# Allegro board megaHeatv2_GND_Final.brd
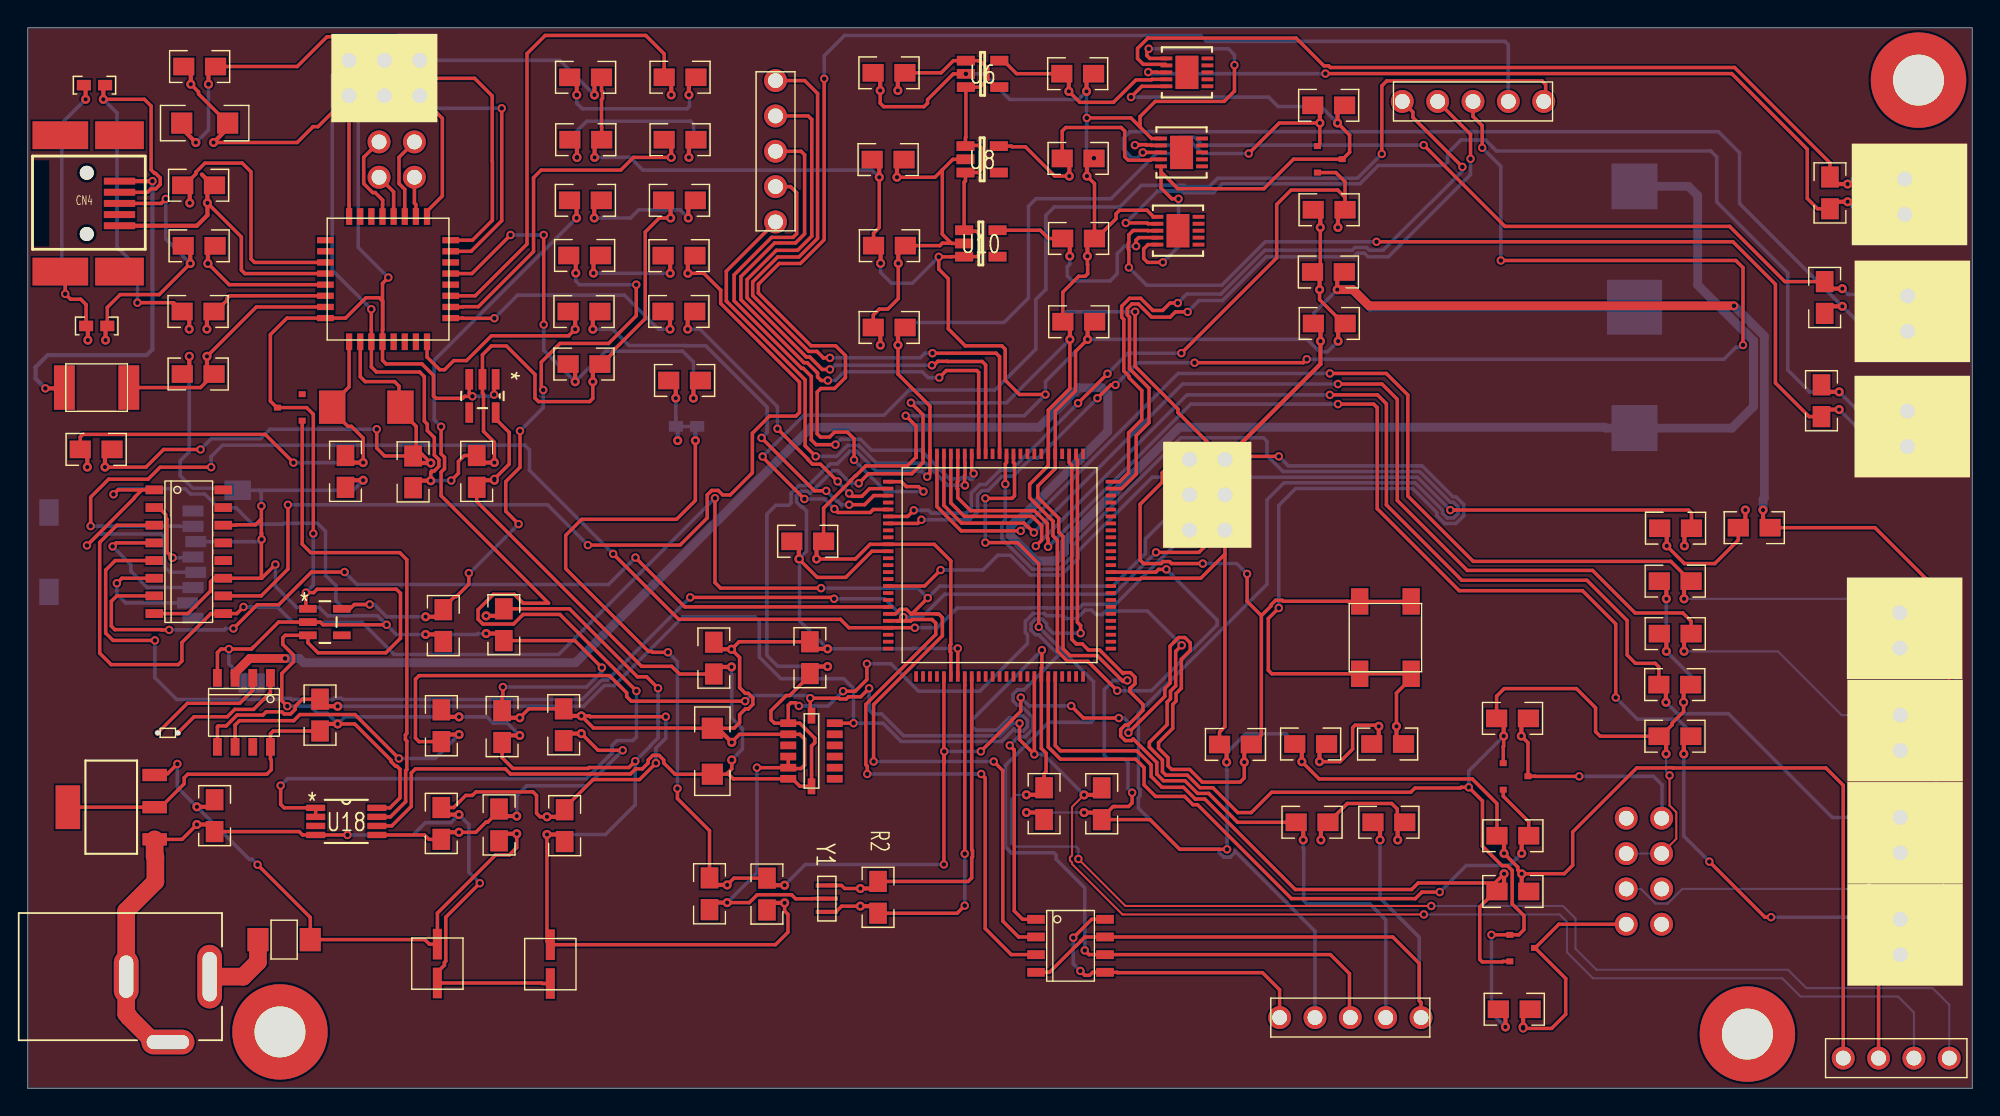
[diagram p0: board, top side]
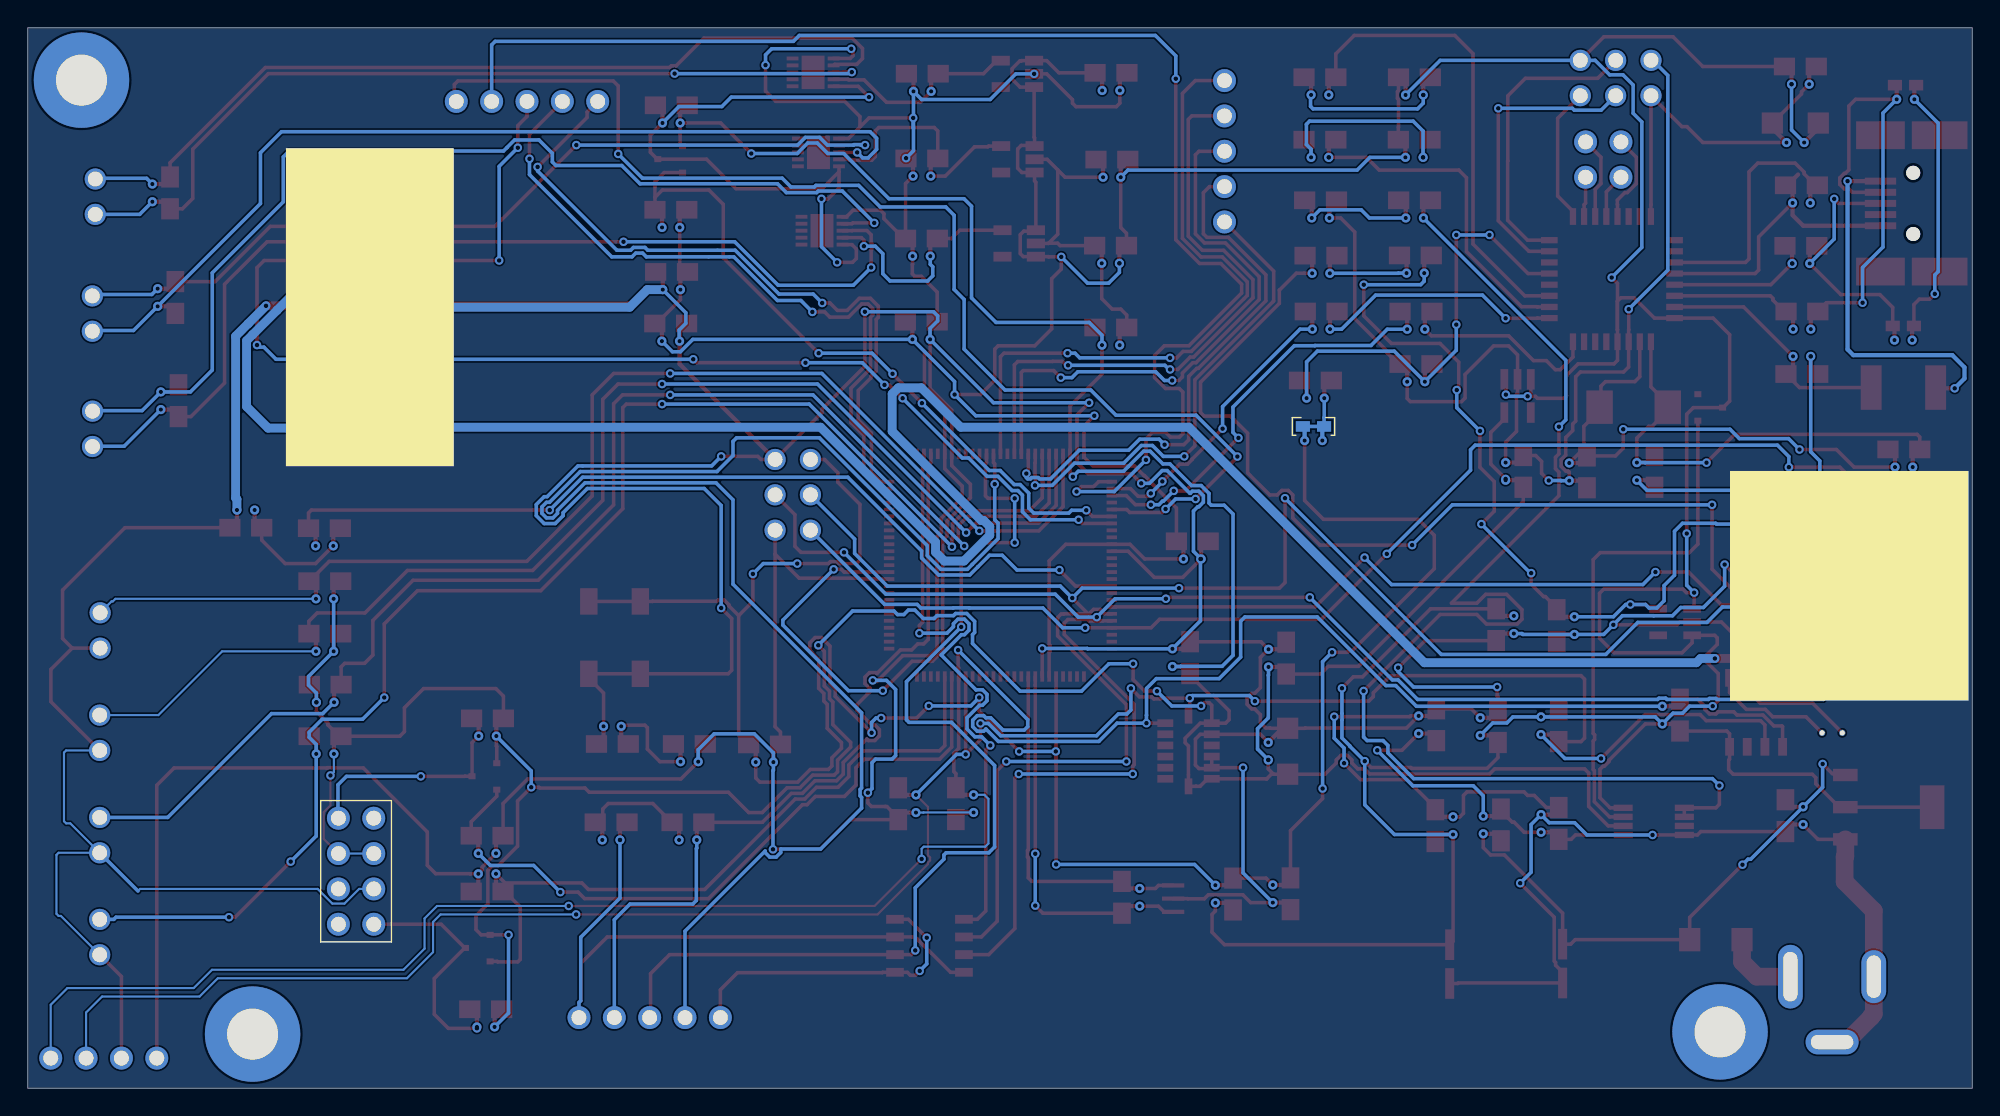
[diagram p1: board, bottom side, seen from below]

Outline 139.7 x 76.2 mm; copper layers: TOP, BOTTOM. Coordinates in mm from the lower left corner of the outline.
Outline path: 0,76.2 139.7,76.2 139.7,0 0,0 0,76.2

## Placement (name value [footprint] x y rotation side)
BT1  CR1220Holder  [CR1220]  115.44 56.12 270 bottom
C1  22P  [0805RF_WV_12D]  48.98 13.97 90 top
C2  100n  [0805RF_WV_12D]  61.89 54.67 0 top
C3  100n  [0805RF_WV_12D]  38.57 18.87 270 top
C4  100n  [0805RF_WV_12D]  75.51 55.08 0 top
C5  100n  [0805RF_WV_12D]  56.03 39.3 0 top
C6  0.1u  [0805RF_WV_12D]  34.07 25.98 90 top
C7  10u/10V  [0805RF_WV_12D]  29.85 33.24 270 top
C8  0.1u  [0805RF_WV_12D]  34.2 33.31 270 top
C9  0.1uF  [0805RF_WV_12D]  129.48 64.34 90 top
C10  0.1uF  [0805RF_WV_12D]  129.1 56.82 90 top
C11  10uF  [0805RF_WV_12D]  61.87 72.97 0 top
C12  10uF  [0805RF_WV_12D]  61.81 66.73 0 top
C13  10uF  [0805RF_WV_12D]  61.91 60.55 0 top
C14  10uF  [0805RF_WV_12D]  75.43 72.9 0 top
C15  10uF  [0805RF_WV_12D]  75.46 66.81 0 top
C16  10uF  [0805RF_WV_12D]  75.5 61.06 0 top
C22  10u  [1206RF_WV_12D]  49.18 24.21 90 top
C23  0.1u  [0805RF_WV_12D]  49.29 30.91 90 top
C24  0.1u  [0805RF_WV_12D]  56.19 30.94 90 top
C25  47u  [RADCAP]  29.43 8.95 90 top
C26  100n  [0805RF_WV_12D]  13.42 19.58 270 top
C27  47u  [RADCAP]  37.54 8.92 90 top
C28  1u  [0805RF_WV_12D]  32.25 44.32 90 top
C29  100n  [0805RF_WV_12D]  29.71 19.02 90 top
C30  100n  [0805RF_WV_12D]  12.24 51.32 180 top
C31  1u  [0805RF_WV_12D]  12.27 64.88 0 top
C32  22P  [0805RF_WV_12D]  22.82 44.32 90 top
C33  22P  [0805RF_WV_12D]  27.68 44.29 90 top
C34  100n  [0805RF_WV_12D]  47.19 50.86 0 top
C35  100n  [0805RF_WV_12D]  93.51 54.95 0 top
C36  100n  [0805RF_WV_12D]  93.45 58.65 0 top
C37  0.1uF  [0805RF_WV_12D]  128.87 49.4 90 top
CN1  uSD  [USD]  1.52 29.11 90 bottom
CN3  DC21MMX_POWERSUPPLY  [DC_JACK]  13.06 8.01 180 top
CN4  USB_B MINI  [USBBMINI]  0.34 63.58 0 top
D1  RED  [0805RF_WV_12D]  46.79 59.83 0 top
D4  CD1206-S01575  [0805RF_WV_12D]  53.11 13.95 90 top
D5  M7  [DO21]  18.41 10.67 180 top
D6  GREEN ON  [0805RF_WV_12D]  97.7 24.73 180 top
D7  YELLOW  [0805RF_WV_12D]  46.82 63.8 0 top
D8  RED  [0805RF_WV_12D]  46.86 68.16 0 top
D9  GREEN  [0805RF_WV_12D]  46.86 72.65 0 top
D10  CD1206-S01575  [1206RF_WV_12D]  12.71 69.35 0 top
D13  RED  [0805RF_WV_12D]  124.04 40.28 180 top
D14  LED  [0805RF_WV_12D]  97.79 19.11 0 top
F2  MF-MSMF050-2 500mA  [FUSE]  4.94 50.35 0 top
J1  ICSP  [ISCP]  83.47 40.1 0 top
J2  CON2  [2X1CONN]  134.85 64.07 0 top
J3  CON2  [2X1CONN]  135.06 55.66 0 top
J4  CON2  [2X1CONN]  135.05 47.38 0 top
J7  HEADER 2x2/SM  [2X2CON]  27.77 65.46 90 top
J8  Reset-EN  [0603RF_WV_12D]  47.33 47.56 180 bottom
J9  HEADER 3x2/SM  [ISCP]  28.16 71.32 90 top
J10  COMM Header  [4X1CONN]  134.25 2.16 90 top
J12  HEADER 5  [5X1CONN]  95.02 5.07 90 top
J13  Extra Digital Pin  [5X1CONN]  103.84 70.91 270 top
J14  Extra Analog Pins  [5X1CONN]  53.72 67.33 0 top
NOREF  -  [unnamed]  18.12 4.04 0 top
NOREF#2  -  [unnamed]  135.85 72.44 0 top
NOREF#3  -  [unnamed]  123.55 3.89 0 top
Q1  MOSFET N  [SOT23]  93.55 66.76 0 top
Q2  MOSFET N  [SOT23]  107.37 10.08 0 top
Q3  MOSFET N  [SOT23]  106.9 22.42 0 top
Q4  FDN340P  [SOT23]  18.82 48.91 180 top
R1  10K  [0805RF_WV_12D]  86.77 24.7 0 top
R2  1M  [0805RF_WV_12D]  61.09 13.72 270 top
R3  10K  [0805RF_WV_12D]  73.02 20.45 270 top
R4  10K  [0805RF_WV_12D]  77.16 20.44 270 top
R5  2.2k  [0805RF_WV_12D]  20.99 26.81 90 top
R6  2.2k  [0805RF_WV_12D]  29.71 26.05 90 top
R7  1k  [0805RF_WV_12D]  40 59.84 0 top
R8  10K  [0805RF_WV_12D]  118.36 36.44 0 top
R9  10K  [0805RF_WV_12D]  118.36 32.66 0 top
R10  10K  [0805RF_WV_12D]  118.33 29 0 top
R11  10K  [0805RF_WV_12D]  118.34 25.29 0 top
R12  10K  [0805RF_WV_12D]  93.47 70.63 0 top
R13  10K  [0805RF_WV_12D]  93.5 63.13 0 top
R20  10K  [0805RF_WV_12D]  106.8 5.67 0 top
R21  10K  [0805RF_WV_12D]  106.7 14.14 180 top
R22  10K  [0805RF_WV_12D]  106.67 26.57 0 top
R23  10K  [0805RF_WV_12D]  106.7 18.14 0 top
R24  1k  [0805RF_WV_12D]  92.17 24.73 0 top
R25  1k  [0805RF_WV_12D]  40.06 63.8 0 top
R26  10K  [0805RF_WV_12D]  33.86 18.92 90 top
R27  10K  [0805RF_WV_12D]  38.5 26.12 90 top
R28  22R  [0805RF_WV_12D]  12.31 60.53 0 top
R29  22R  [0805RF_WV_12D]  12.23 55.82 0 top
R30  1M  [0805RF_WV_12D]  4.91 45.9 0 top
R31  1k  [0805RF_WV_12D]  39.96 55.81 0 top
R32  1k  [0805RF_WV_12D]  46.77 55.82 0 top
R33  1k  [0805RF_WV_12D]  40.09 68.16 0 top
R34  1k  [0805RF_WV_12D]  40.07 72.64 0 top
R35  1k  [0805RF_WV_12D]  39.96 52.04 0 top
R36  10K  [0805RF_WV_12D]  12.34 73.42 0 top
R39  768  [0805RF_WV_12D]  118.39 40.24 0 top
R40  750  [0805RF_WV_12D]  92.27 19.11 0 top
RT1  EC95F  [2X1CONN]  134.51 32.89 0 top
RT2  EC95F  [2X1CONN]  134.54 25.54 0 top
RT3  EC95F  [2X1CONN]  134.54 18.19 0 top
RT4  EC95F  [2X1CONN]  134.54 10.86 0 top
RV1  CG0603MLC-05E  [0603RF_WV_12D]  4.95 54.78 0 top
RV2  CG0603MLC-05E  [0603RF_WV_12D]  4.79 72.08 0 top
SW1  SW PUSHBUTTON-SPST-2/SM  [SMDPB]  97.54 32.38 90 top
U1  ATmega2560-TQFP  [MEGA2560]  69.82 37.59 0 top
U2  DS1307  [SOIC8]  15.53 27.01 270 top
U3  CD74HC4050  [SOIC16]  11.56 38.55 0 top
U4  LP2983  [MF05A]  21.34 33.5 0 top
U5  MAX31850  [TDFN10]  83.28 73 0 top
U6  MIC5225-3.3YM5  [DBV0005A_M]  68.6 72.89 0 top
U7  MAX31850  [TDFN10]  82.89 67.25 0 top
U8  MIC5225-3.3YM5  [DBV0005A_M]  68.57 66.75 0 top
U9  MAX31850  [TDFN10]  82.64 61.62 0 top
U10  MIC5225-3.3YM5  [DBV0005A_M]  68.47 60.71 0 top
U14  ESP8266  [ESP8266_MODULE]  116.12 15.59 180 bottom
U15  -  [ADXL345]  56.31 24.23 0 top
U16  NCP1117ST50T3G  [DCY4]  5.99 20.19 90 top
U17  LP2985  [DBV5]  32.66 49.75 270 top
U18  LMV358IDGKR  [MUA]  22.88 19.17 0 top
U19  ATmega16U2-TQFP  [ATMEGA16U2]  25.88 58.14 90 top
U20  MCP4131  [SOIC8]  74.92 10.23 0 top
Y1  CSTCE16M0V53-R0 16MHZ  [CSTCE16M0V53]  57.41 13.62 270 top
Y2  32.768  [ECS3X8]  10.06 25.53 0 top
Y4  16MHz  [ECX64A]  24.32 48.94 180 top

## Library data of the parts
BT1 = CR1220Holder
C1-C5 C9-C16 C23 C24 C26 C28-C37 = CAPACITOR NON-POL
C6-C8 C22 C25 C27 = C
CN1 = uSD
CN3 = CONN PLUG 3: User Part Number: X; Tolerance: X
CN4 = USB_B MINI
D1 D6-D9 D13 D14 = LED
D4 D5 D10 = DIODE
F2 = FUSE
J1 J9 = HEADER 3x2/SM
J2-J4 = CON2
J7 = HEADER 2x2/SM
J8 = JUMPER
J10 = HEADER 4
J12-J14 = HEADER 5
Q1-Q3 = MOSFET N
Q4 = MOSFET P
R1-R13 R20-R36 R39 R40 = R
RT1-RT4 = THERMISTOR
RV1 RV2 = VARISTOR
SW1 = SW PUSHBUTTON-SPST-2/SM
U1 = ATmega2560-TQFP_1
U2 = DS1307
U3 = CD74HC4050M_0
U4 = LP2983 SOT-23
U5 U7 U9 = MAX31850_0
U6 U8 U10 = MIC5225-3.3YM5
U14 = ESP8266_0
U15 = ADXL345
U16 = NCP1117ST50_0
U17 = LP2985_0
U18 = LMV358
U19 = ATmega16U2-TQFP_1
U20 = MCP4131
Y1 = OSC6/SM
Y2 = CRYSTAL
Y4 = XM/SM

## Footprints (pads in the part's own frame, mm; a bottom-side part is the same pattern mirrored in y, then rotated)
2X1CONN
  round 1.524 hole 1.067: 1(0,1.27) 2(0,-1.27)
2X2CON
  round 1.651 hole 1.067: 1(0,0) 2(0,2.54) 3(2.54,0) 4(2.54,2.54)
4X1CONN
  round 1.651 hole 1.067: 1(0,3.81) 2(0,1.27) 3(0,-1.27) 4(0,-3.81)
5X1CONN
  round 1.651 hole 1.067: 1(0,5.08) 2(0,2.54) 3(0,0) 4(0,-2.54) 5(0,-5.08)
0603RF_WV_12D
  rect 1.016x0.762 smd: 1(-0.762,0) 2(0.762,0)
0805RF_WV_12D
  rect 1.524x1.27 smd: 1(-1.143,0) 2(1.143,0)
1206RF_WV_12D
  rect 1.524x1.524 smd: 1(-1.651,0) 2(1.651,0)
ADXL345
  rect 1.145x0.55 smd: 1(-1.67,2) 2(-1.67,1.2) 3(-1.67,0.4) 4(-1.67,-0.4) 5(-1.67,-1.2) 6(-1.67,-2) 8(1.67,-2) 9(1.67,-1.2) 10(1.67,-0.4) 11(1.67,0.4) 12(1.67,1.2) 13(1.67,2)
  rect 1.145x0.55 smd rot 89.7: 7(0,-2.54) 14(0,2.54)
ATMEGA16U2
  rect 1.2x0.45 smd: 1(-4.5,2.8) 2(-4.5,2) 3(-4.5,1.2) 4(-4.5,0.4) 5(-4.5,-0.4) 6(-4.5,-1.2) 7(-4.5,-2) 8(-4.5,-2.8) 17(4.5,-2.8) 18(4.5,-2) 19(4.5,-1.2) 20(4.5,-0.4) 21(4.5,0.4) 22(4.5,1.2) 23(4.5,2) 24(4.5,2.8)
  rect 0.45x1.2 smd: 9(-2.8,-4.5) 10(-2,-4.5) 11(-1.2,-4.5) 12(-0.4,-4.5) 13(0.4,-4.5) 14(1.2,-4.5) 15(2,-4.5) 16(2.8,-4.5) 25(2.8,4.5) 26(2,4.5) 27(1.2,4.5) 28(0.4,4.5) 29(-0.4,4.5) 30(-1.2,4.5) 31(-2,4.5) 32(-2.8,4.5)
CR1220
  rect 3.302x3.302 smd: 1(-8.687,0) 3(8.687,0)
  rect 3.962x3.962 smd: 2(0,0)
CSTCE16M0V53
  rect 0.3x1.6 smd: 1(-0.95,0) 2(0,0) 3(0.95,0)
DBV5
  rect 1.473x0.559 smd: 1(-1.194,0.95) 2(-1.194,0) 3(-1.194,-0.95) 4(1.194,-0.95) 5(1.194,0.95)
DBV0005A_M
  rect 1.3x0.7 smd: 1(-1.2,0.95) 2(-1.2,0) 3(-1.2,-0.95) 4(1.2,-0.95) 5(1.2,0.95)
DC_JACK
  oval 1.778x4.572 hole 1.016x3.556: 1(0,0)
  oval 1.778x3.81 hole 1.016x3.048: 2(5.994,0)
  oval 3.81x1.778 hole 3.048x1.016: 3(2.997,4.699)
DCY4
  rect 0.889x1.765 smd: 1(-2.311,-3.118) 2(0,-3.118) 3(2.311,-3.118)
  rect 3.15x1.765 smd: 4(0,3.118)
DO21
  rect 1.524x1.676 smd: 1(-1.88,0) 2(1.88,0)
ECS3X8
  round 0.45 hole 0.35: 1(-0.725,0) 2(0.725,0)
ECX64A
  rect 1.9x2.4 smd: 1(-2.45,0) 2(2.45,0)
ESP8266_MODULE
  round 1.651 hole 1.067: 1(-1.27,3.81) 2(-1.27,1.27) 3(-1.27,-1.27) 4(-1.27,-3.81) 5(1.27,3.81) 6(1.27,1.27) 7(1.27,-1.27) 8(1.27,-3.81)
FUSE
  rect 1.5x3.2 smd: 1(-2.315,0) 2(2.315,0)
ISCP
  round 1.524 hole 1.067: 1(0,0) 2(2.54,0) 3(0,2.54) 4(2.54,2.54) 5(0,5.08) 6(2.54,5.08)
MEGA2560
  rect 0.75x0.27 smd: 1(-8,6) 2(-8,5.5) 3(-8,5) 4(-8,4.5) 5(-8,4) 6(-8,3.5) 7(-8,3) 8(-8,2.5) 9(-8,2) 10(-8,1.5) 11(-8,1) 12(-8,0.5) 13(-8,0) 14(-8,-0.5) 15(-8,-1) 16(-8,-1.5) 17(-8,-2) 18(-8,-2.5) 19(-8,-3) 20(-8,-3.5) 21(-8,-4) 22(-8,-4.5) 23(-8,-5) 24(-8,-5.5) 25(-8,-6) 51(8,-6) 52(8,-5.5) 53(8,-5) 54(8,-4.5) 55(8,-4) 56(8,-3.5) 57(8,-3) 58(8,-2.5) 59(8,-2) 60(8,-1.5) 61(8,-1) 62(8,-0.5) 63(8,0) 64(8,0.5) 65(8,1) 66(8,1.5) 67(8,2) 68(8,2.5) 69(8,3) 70(8,3.5) 71(8,4) 72(8,4.5) 73(8,5) 74(8,5.5) 75(8,6)
  rect 0.27x0.75 smd: 26(-6,-8) 27(-5.5,-8) 28(-5,-8) 29(-4.5,-8) 30(-4,-8) 31(-3.5,-8) 32(-3,-8) 33(-2.5,-8) 34(-2,-8) 35(-1.5,-8) 36(-1,-8) 37(-0.5,-8) 38(0,-8) 39(0.5,-8) 40(1,-8) 41(1.5,-8) 42(2,-8) 43(2.5,-8) 44(3,-8) 45(3.5,-8) 46(4,-8) 47(4.5,-8) 48(5,-8) 49(5.5,-8) 50(6,-8) 76(6,8) 77(5.5,8) 78(5,8) 79(4.5,8) 80(4,8) 81(3.5,8) 82(3,8) 83(2.5,8) 84(2,8) 85(1.5,8) 86(1,8) 87(0.5,8) 88(0,8) 89(-0.5,8) 90(-1,8) 91(-1.5,8) 92(-2,8) 93(-2.5,8) 94(-3,8) 95(-3.5,8) 96(-4,8) 97(-4.5,8) 98(-5,8) 99(-5.5,8) 100(-6,8)
MF05A
  rect 1.27x0.559 smd: 1(-1.219,0.953) 2(-1.219,0) 3(-1.219,-0.953) 4(1.219,-0.953) 5(1.219,0.953)
MUA
  rect 1.372x0.457 smd: 1(-2.197,0.975) 2(-2.197,0.325) 3(-2.197,-0.325) 4(-2.197,-0.975) 5(2.197,-0.975) 6(2.197,-0.325) 7(2.197,0.325) 8(2.197,0.975)
RADCAP
  rect 2.2x0.65 smd: 1(1.395,0) 2(-1.395,0)
SMDPB
  rect 1.9x1.25 smd: 1(-2.6,1.85) 2(-2.6,-1.85) 3(2.6,-1.85) 4(2.6,1.85)
SOIC8
  rect 1.27x0.635 smd: 1(-2.477,1.905) 2(-2.477,0.635) 3(-2.477,-0.635) 4(-2.477,-1.905) 5(2.477,-1.905) 6(2.477,-0.635) 7(2.477,0.635) 8(2.477,1.905)
SOIC16
  rect 1.27x0.635 smd: 1(-2.477,4.445) 2(-2.477,3.175) 3(-2.477,1.905) 4(-2.477,0.635) 5(-2.477,-0.635) 6(-2.477,-1.905) 7(-2.477,-3.175) 8(-2.477,-4.445) 9(2.477,-4.445) 10(2.477,-3.175) 11(2.477,-1.905) 12(2.477,-0.635) 13(2.477,0.635) 14(2.477,1.905) 15(2.477,3.175) 16(2.477,4.445)
SOT23
  rect 0.508x0.432 smd: 1(-0.889,0.94) 2(-0.889,-0.965) 3(0.889,0)
TDFN10
  rect 1.65x2.4 smd: (0,0)
  rect 0.85x0.28 smd: 1(-1.475,1) 2(-1.475,0.5) 3(-1.475,0) 4(-1.475,-0.5) 5(-1.475,-1) 6(1.475,-1) 7(1.475,-0.5) 8(1.475,0) 9(1.475,0.5) 10(1.475,1)
unnamed
  round 6.858 hole 3.658: (0,0)
USBBMINI
  rect 2.25x0.5 smd: 1(6.251,1.6) 2(6.251,0.8) 3(6.251,0) 4(6.248,-1.605) 5(6.248,-0.803)
  round 1.001 hole 1.001: 6(3.899,2.2) 7(3.899,-2.2)
  rect 4x1.999 smd: 8(1.999,4.9) 10(1.999,-4.9)
  rect 3.5x1.999 smd: 9(6.251,4.9) 11(6.251,-4.9)
USD
  rect 0.8x1.5 smd: 1(4.66,10.34) 2(5.76,9.94) 3(6.86,10.34) 4(7.96,10.54) 5(9.06,10.343) 6(10.16,10.54) 7(11.26,10.34) 8(12.36,10.34)
  rect 1.9x1.4 smd: 9(12.25,0) 10(6.55,0)
  rect 1.4x1.9 smd: 11(0,14.55) 12(13.85,13.55)

## Nets
3V3: C2.2 C22.1 C23.1 C24.1 C28.1 Q1.1(GATE) Q2.1(GATE) Q3.1(GATE) R8.1 R9.1 R10.2 R11.1 R12.1 R20.1 R22.1 U1.98(AREF) U14.2(VCC) U14.6(CHPD) U15.1(VDD) U15.6(VSS) U15.7(CS) U17.5(OUT) U18.6(2IN-)
3V3_A1: C14.1 U5.4(VDD) U6.5(OUT)
3V3_A2: C15.1 U7.4(VDD) U8.5(OUT)
3V3_A3: C16.1 U9.4(VDD) U10.5(OUT)
5V: C3.2 C4.2 C5.2 C6.1 C8.1 C11.2 C12.1 C13.1 C27.1 C35.2 C36.1 D4.1(K) D10.1(K) J1.2 J9.2 J10.1 Q4.3(SOURCE) R1.1 R3.2 R4.2 R5.1 R6.2 R13.1 R21.1 R23.1 R24.1 R33.2 R34.2 R36.2 U1.10(VCC) U1.31(VCC0) U1.61(VCC1) U1.80(VCC2) U1.100(AVCC) U2.8(VCC) U4.1(VIN) U4.3(ON/OFF) U6.1(IN) U6.3(EN) U8.1(IN) U8.3(EN) U10.1(IN) U10.3(EN) U16.2(OUT) U16.4(TAB) U17.1(IN) U17.3(ON/OFF) U18.8(VCC) U19.4(VCC) U19.32(AVCC)
GND: BT1.2(NEG) C1.1 C2.1 C3.1 C4.1 C5.1 C6.2 C7.2 C8.2 C11.1 C12.2 C13.2 C14.2 C15.2 C16.2 C22.2 C23.2 C24.2 C25.2 C26.2 C27.2 C28.2 C29.2 C30.2 C32.1 C33.1 C35.1 C36.2 CN1.6(VSS) CN1.11(MT1) CN1.12(MT2) CN3.2 CN3.3 D6.1(CATHODE) D7.1(CATHODE) D13.1(CATHODE) J1.6 J9.6 J10.2 R27.2 R35.2 RT1.2 RT2.2 RT3.2 RT4.2 SW1.1 SW1.2 U1.11(GND) U1.32(GND0) U1.62(GND1) U1.81(GND2) U1.99(AGND) U2.4(GND) U3.8(GND) U3.11(5A) U3.14(6A) U4.2(GND) U5.1(GND) U6.2(GND) U7.1(GND) U8.2(GND) U9.1(GND) U10.2(GND) U14.7(GND) U15.2(GND) U15.4(GND1) U15.5(GND2) U16.1(GND) U17.2(GND) U18.4(GND) U19.3(GND) Y1.2
VDD: C7.1 CN1.4(VDD) R7.1 U3.1(VCC) U4.5(VOUT)
VIN: C25.1 C26.1 D5.1(K) R26.1 U16.3(IN)
A0: R8.2 RT1.1 U1.97(PF0)
A1: R9.2 RT2.1 U1.96(PF1)
A2: R10.1 RT3.1 U1.95(PF2)
A3: R11.2 RT4.1 U1.94(PF3)
A4: J14.5 U1.93(PF4)
A5: J14.4 U1.92(PF5)
A6: J14.3 U1.91(PF6)
A7: J14.2 U1.90(PF7)
A9: J14.1 U1.88(PK1)
A10: J12.2 U1.87(PK2)
A11: J12.3 U1.86(PK3) U20.6(P0W)
ADC8: U1.89(PK0)
ADC12: U1.85(PK4)
ADC13: U1.84(PK5)
ADC14: U1.83(PK6)
ADC15: U1.82(PK7)
CD: CN1.9(CD1)
CMP: C29.1 R26.2 R27.1 U18.5(2IN+)
COMP_5V: J12.1 U20.5(P0A) U20.8(VDD)
COMP_GND: D14.1(CATHODE) J12.5 U20.4(VSS) U20.7(P0B)
CS: CN1.2(CS) U3.6(3Y)
D2: Q1.2(DRAIN) R13.2 U1.6(PE4)
D3: J13.3 U1.7(PE5)
D4: J13.2 U1.1(PG5)
D5: J13.1 U1.5(PE3)
D8: R39.2 U1.16(PH4)
D22: J12.4 R40.1 U1.78(PA0)
D23: U1.77(PA1) U20.1(CS)
D24: U1.76(PA2)
D25: J13.5 U1.75(PA3)
D26: J13.4 U1.74(PA4)
D27: U1.73(PA5)
D28: U1.72(PA6)
D29: U1.71(PA7)
D50: CN1.7(DATA_OUT) J1.1 U1.22(PB3)
D51: J1.4 U1.21(PB2) U3.5(2A) U20.3(SDI)
D52: J1.3 U1.20(PB1) U3.3(1A) U3.9(4A) U20.2(SCK)
D53: U1.19(PB0) U3.7(3A)
D+: CN4.3(D+) R28.1 RV1.2
D-: CN4.2(D-) R29.1 RV2.2
DATA: Q1.3(SOURCE) R12.2 U5.5(DQ) U7.5(DQ) U9.5(DQ)
DATA_IN: CN1.3(DATA_IN) U3.4(2Y)
DTR: C34.2 R35.1 U19.13(PD7)
GATE_CMD: Q4.1(GATE) U18.7(2OUT)
M8RXD: R32.1 U19.9(PD3)
M8TXD: R31.1 U19.8(PD2)
MISO2: J9.1 U19.17(PB3)
MOSI2: J9.4 U19.16(PB2)
PB4: U1.23(PB4)
PB5: U1.24(PB5)
PB6: U1.25(PB6)
PB7: U1.26(PB7)
PB7_118442: U18.3(1IN+)
PC0: U1.53(PC0)
PC1: U1.54(PC1)
PC2: U1.55(PC2)
PC3: U1.56(PC3)
PC4: U1.57(PC4)
PC5: U1.58(PC5)
PC6: U1.59(PC6)
PC7: U1.60(PC7)
PD7: U1.50(PD7)
PG0: U1.51(PG0)
PG1: U1.52(PG1)
PG2: U1.70(PG2)
PH3: U1.15(PH3)
PH5: U1.17(PH5)
PH6: U1.18(PH6)
PL0: U1.35(PL0)
PL1: U1.36(PL1)
PL2: U1.37(PL2)
PL3: U1.38(PL3)
PL4: U1.39(PL4)
PL5: U1.40(PL5)
PL6: U1.41(PL6)
PL7: U1.42(PL7)
RD+: R28.2 U19.29(D+)
RD-: R29.2 U19.30(D-)
RESET: C1.2 C34.1 D4.2(A) J1.5 J8.1 J8.2 R1.2 SW1.3 SW1.4 U1.30(RESET)
RESET2: D10.2(A) J9.5 R36.1 U19.24(RESET)
RX: Q3.3(SOURCE) R22.2 U14.1(URXD)
RX0: R32.2 U1.2(PE0)
RX1: Q3.2(DRAIN) R23.2 U1.45(PD2)
RXD2: U1.12(PH0)
RXD3: U1.63(PJ0)
RXL: D8.1(CATHODE) U19.10(PD4)
SCK: CN1.5(SCLK) U3.2(1Y)
SCK2: J9.3 U19.15(PB1)
SCL: J10.3 R4.1 R6.1 U1.43(PD0) U2.6(SCL) U15.14(SCL)
SDA: J10.4 R3.1 R5.2 U1.44(PD1) U2.5(SDA) U15.13(SDA)
T1+: C9.1 J2.2 U5.3(T+)
T1-: C9.2 J2.1 U5.2(T-)
T2+: C10.1 J3.2 U7.3(T+)
T2-: C10.2 J3.1 U7.2(T-)
T3+: C37.1 J4.2 U9.3(T+)
T3-: C37.2 J4.1 U9.2(T-)
TX: Q2.3(SOURCE) R20.2 U14.8(UTXD)
TX0: R31.2 U1.3(PE1)
TX1: Q2.2(DRAIN) R21.2 U1.46(PD3)
TXD2: U1.13(PH1)
TXD3: U1.64(PJ1)
TXL: D9.1(CATHODE) U19.11(PD5)
UGND: C31.2 CN4.4(GND) U19.28(UGND)
USBVCC: Q4.2(DRAIN)
USBVCC_67256: C30.1 F2.2 U19.31(UVCC)
XTAL1: R2.1 U1.34(XTAL1) Y1.1
XTAL2: R2.2 U1.33(XTAL2) Y1.3
N49913: U5.6(AD0)
N49921: U5.7(AD1)
N49929: U5.8(AD2)
N49937: U5.9(AD3)
N50039: U7.6(AD0)
N50047: U7.7(AD1)
N50055: U7.8(AD2)
N50063: U7.9(AD3)
N50153: U9.6(AD0)
N50161: U9.7(AD1)
N50169: U9.8(AD2)
N50177: U9.9(AD3)
N67463: C32.2 R30.1 U19.1(XTAL1) Y4.2
N67475: C33.2 R30.2 U19.2((PC0)XTAL2) Y4.1
N69961: J7.1(3) U19.18(PB4)
N69973: J7.2(4) U19.20(PB6)
N69986: J7.3(1) U19.19(PB5)
N69998: J7.4(2) U19.21(PB7)
N74387: CN4.10(MT3) RV1.1 RV2.1
N75068: C31.1 U19.27(UCAP)
N94564: U2.1(X1) Y2.2
N94576: U2.2(X2) Y2.1
N95840: D1.2(ANODE) U3.10(4Y)
N95896: D1.1(CATHODE) R7.2
N117689: CN3.1 D5.2(A)
N118450: R25.1 U18.1(1OUT) U18.2(1IN-)
N147126: BT1.1(PW1) BT1.3(PW2) U2.3(VBAT)
N705510: D9.2(ANODE) R34.1
N709150: D8.2(ANODE) R33.1
N742370: CN4.1(VCC) F2.1
N1183820: D6.2(ANODE) R24.2
N1184920: D7.2(ANODE) R25.2
N1866050: D13.2(ANODE) R39.1
N1974051: D14.2(ANODE) R40.2

Pads without a net: CN1 1 8 10; CN4 5 6 7 8 9 11; U1 4 8 9 14 27 28 29 47 48 49 65 66 67 68 69 79; U2 7; U3 12 13 15 16; U4 4; U5 10; U6 4; U7 10; U8 4; U9 10; U10 4; U14 3 4 5; U15 3 8 9 10 11 12; U17 4; U19 5 6 7 12 14 22 23 25 26

## Via types
v1: diameter 0.61, hole 0.33, TOP to BOTTOM, 224 vias
v2: diameter 0.66, hole 0.305, TOP to BOTTOM, 148 vias

## Routing (per net, layer and track width the routed paths; a pad name or vN(x,y) marks a point on that pad's centre or on a via; arc(x,y) is an arc through that point)
3V3: length 323.7
  TOP w0.152: v1(117.96,22.47) 117.96,20.32 118.44,19.84 118.44,17.91 U14.2
  TOP w0.254: U18.6 26.15,18.85 27.55,20.25 27.55,22.65 27.84,22.94 34.31,22.94 34.68,22.57 40.43,22.57 40.44,22.58 43.3,22.58 43.66,22.94 44.14,22.94 44.57,23.37 44.57,23.59 44.9,23.91 45.36,23.91 45.69,23.59 45.69,23.37 46.5,22.56 C22.1 50.2,22.56 ; C23.1 46.82,29.76 46.27,30.31 44.1,30.31 32.25,42.16 C28.1 ; Q1.1 92.83,67.88 v2(92.83,69.36) 89.92,69.36 v1(87.72,67.17) ; v2(106.04,25.3) 106.04,24.58 106.01,24.55 Q3.1 ; v1(33.52,43.78) 34.59,44.85 34.59,47.12 33.61,48.09 U17.5 ; R22.1 105.53,28.17 106.07,28.71 111.26,28.71 112.64,27.34 112.64,25.62 112.97,25.29 R11.1 117.33,25.29 118.14,26.11 118.14,26.23 118.97,27.06 v1(118.97,27.73) ; U15.1 55.46,26.23 56.55,25.15 56.55,24.83 56.31,24.59 56.31,22.52 U15.7 55.78,21.69 55.77,21.69 55.47,21.69 54.93,22.23 U15.6 50.69,22.23 ; U15.1 53.64,26.23 53.39,26.49 53.39,27.12 54.49,28.22 54.74,28.22 56.19,29.67 C24.1 ; U15.1 54.64,27.51 54.82,27.69 55.17,27.69 v1(55.4,27.47) ; 50.69,22.23 50.36,22.56 50.2,22.56 ; 50.69,22.23 50.7,22.22 ; v1(60.29,30.5) 60.29,29.37 59.45,28.53 v1(58.57,28.53) ; v1(64.62,43.94) 64.82,44.14 U1.98 64.82,49.02 62.52,51.31 v2(62.52,53.4) ; 50.65,23.6 v1(50.57,23.6) 50.58,23.59 v2(50.58,23.58) 50.58,22.94 50.2,22.56 ; v1(105.16,11.02) Q2.1 107.12,11.02 107.5,11.39 107.5,12.4 106.65,13.25 106.65,15.65 106.31,15.99 105.92,15.99 104.51,17.39 104.51,20.64 v1(103.53,21.62) 102.97,21.62 102.92,21.57 99.67,21.57 99.36,21.27 89.36,21.27 87.9,19.81 86.93,19.81 85.15,21.59 84.22,21.59 83.31,22.5 81.76,22.5 81.52,22.74 81.52,23.57 80.58,24.51 80.58,24.85 81.86,26.13 81.86,27.75 82.1,27.99 82.1,28.53 82.47,28.91 82.47,31.39 v1(82.91,31.83)
  TOP w0.305: R22.1 106.04,26.07 v2(106.04,25.3) ; R10.2 118.97,28.49 v1(118.97,27.73) ; v2(92.83,69.36) 92.83,70.12 R12.1 ; v2(117.73,35.17) 117.73,35.93 R8.1 ; v2(117.71,24.02) 117.71,24.78 R11.1 ; C2.2 62.52,54.16 v2(62.52,53.4) ; C24.1 56.7,30.3 v2(57.46,30.3) ; v2(33.52,43.69) 32.76,43.69 C28.1 ; v2(117.73,31.39) 117.73,32.16 R9.1 ; v2(50.56,30.27) 49.8,30.27 C23.1 ; v2(106.17,4.4) 106.17,5.16 R20.1
  BOTTOM w0.152: U14.6 U14.2 ; v1(117.96,22.47) 117.71,22.72 v2(117.71,24.02)
  BOTTOM w0.254: v1(50.57,23.6) 51.35,24.37 51.35,25.83 50.57,26.61 50.57,29.67 50.56,29.69 v2(50.56,30.27) ; v1(60.29,30.5) 62.03,30.5 64,28.53 68.4,28.53 71.82,31.95 71.82,32.59 71.67,32.75 71.67,33.55 72.24,34.11 73.04,34.11 73.19,33.96 74.38,33.96 74.59,33.75 75.36,33.75 75.97,34.36 76.43,34.36 76.76,34.03 77.21,34.03 77.47,34.29 80.44,34.29 v1(82.91,31.83) ; v1(118.97,27.73) 118.97,28.4 119.53,28.96 119.53,29.59 v2(117.73,31.39) v2(117.73,35.17) ; v1(87.72,67.17) 84.42,67.17 83.67,67.92 82.97,67.92 82.22,67.17 81.07,67.17 77.83,63.92 72.43,63.92 71.89,63.38 71.89,56.79 70.14,55.03 63.44,55.03 62.52,54.11 v2(62.52,53.4) ; v1(64.62,43.94) 64.22,44.34 60.97,44.34 60.63,44.67 59.53,45.78 59.06,45.78 58.15,44.86 57.64,44.86 56.09,43.31 55.4,43.31 54.83,42.74 54.83,42.05 54.67,41.89 53.74,41.89 53.11,41.26 53.11,31.1 53.89,30.31 56.86,30.31 56.88,30.3 v2(57.46,30.3) ; v1(103.53,21.62) 103.53,22.8 v2(106.04,25.3) ; v1(55.4,27.47) 57.51,27.47 v1(58.57,28.53) ; v2(33.52,43.69) v1(33.52,43.78) ; v2(106.17,4.4) 105.16,5.4 v1(105.16,11.02)
3V3_A1: length 14.4
  TOP w0.254: U6.5 70.1,73.84 71.04,72.9 C14.1 ; U5.4 80.77,72.5 80.73,72.46 79.62,72.46 78,70.85 75.58,70.85 v2(74.8,71.63)
  TOP w0.305: C14.1 74.8,72.4 v2(74.8,71.63)
3V3_A2: length 18.7
  TOP w0.254: v2(74.83,65.54) 73.78,65.54 71.68,67.65 70.73,67.65 70.67,67.7 U8.5 ; U7.4 80.74,66.75 80.68,66.69 79.06,66.69 78.81,66.94 78.81,68.78 78.56,69.04 74.57,69.04 74.32,68.78 C15.1
  TOP w0.305: C15.1 74.83,66.31 v2(74.83,65.54)
3V3_A3: length 16.9
  TOP w0.254: C16.1 73.34,61.06 72.74,61.66 U10.5 ; U9.4 79.81,61.12 79.63,60.94 v1(79.63,60.51)
  TOP w0.305: v2(74.86,59.79) 74.86,60.55 C16.1
  BOTTOM w0.254: v1(79.63,60.51) 78.81,60.51 78.27,59.97 78.27,58.53 77.75,58.01 75.05,58.01 74.68,58.38 74.68,59.03 74.86,59.21 v2(74.86,59.79)
5V: length 605.1
  TOP w0.254: R23.1 105.56,20.45 103.79,22.22 92.78,22.22 v2(91.54,23.46) ; v1(63.07,48.32) 63.82,47.58 U1.100 63.82,45.35 63.19,44.72 60.2,44.72 59.51,44.02 59.47,44.02 59.14,43.7 59.14,43.66 57.18,41.69 C5.2 ; J10.1 130.44,21.77 129.19,23.01 118.21,23.01 118.19,23.03 117.73,23.03 117.71,23.01 115.6,23.01 111,18.42 111,16.01 110.39,15.41 107.92,15.41 107.92,15.41 v2(107.33,15.41) 107.05,15.68 107.05,15.88 v2(106.06,16.87) ; C35.2 94.53,54.95 92.81,56.67 v2(92.81,57.38) ; C11.2 65.62,72.97 66.5,73.84 U6.1 68.3,73.84 68.33,73.82 68.43,73.82 68.98,73.27 68.98,72.52 68.87,72.41 68.87,72.4 68.41,71.94 U6.3 67.4,68.34 67.37,68.31 U8.1 67.41,67.75 68.33,67.75 68.58,67.49 68.58,66.11 68.27,65.8 U8.3 67.37,65.2 67.27,65.1 U10.1 67.34,61.59 68.14,61.59 68.4,61.33 68.4,59.98 68.18,59.76 U10.3 66.37,59.76 66.35,59.74 v1(65.45,59.74) 65.45,58.86 66.14,58.17 66.14,54.57 67.35,53.35 69.99,53.35 70.22,53.11 70.22,50.87 71.25,49.85 v1(73.11,49.85) ; U1.31 66.32,31.31 66.26,31.37 66.26,31.83 66.32,31.89 66.32,37.89 65.12,39.09 U1.10 60.51,39.09 59.46,38.03 v2(56.67,38.03) ; v2(37.3,18.23) 37.3,10.55 C27.1 53.72,10.31 54.62,11.21 54.62,12.49 54.38,12.73 v2(54.38,13.32) ; v1(79.34,21.23) 79.34,20.5 79.09,20.24 78.1,20.24 78.1,20.24 77.97,20.24 77.16,19.42 R4.2 80.63,19.3 82.77,17.16 v1(86.16,17.16) ; R5.1 17.63,25.67 17.43,25.46 U2.8 17.43,23.64 17.49,23.58 17.49,22.89 17.17,22.56 11.49,22.56 11.23,22.31 11.23,21.88 9.55,20.19 U16.2 U16.4 ; v1(45.28,28.74) 44.46,29.56 43.8,29.56 38.91,34.45 C8.1 ; 86.01,38.38 84.28,36.65 79.99,36.65 79.92,36.59 U1.61 ; 86.01,38.38 86.01,25.98 85.62,25.59 R1.1 ; 86.01,38.38 J1.2 ; v2(92.86,61.86) 92.86,59.21 C36.1 ; v1(78.99,29.31) 78.98,29.29 78.77,29.29 78.7,29.22 76.83,31.08 74.88,31.08 74.38,31.58 74.38,39.64 74.07,39.95 74.07,40.96 72.57,42.46 72.57,43.27 73.82,44.52 U1.80 73.82,48.65 75.28,50.11 75.28,52.95 v2(76.14,53.81) ; R33.2 41.23,69.05 41.22,69.06 41.22,71.06 41.29,71.13 41.29,71.62 41.22,71.69 R34.2 ; v1(25.9,58.25) 25.48,57.84 25.48,54.49 ; v1(18.64,27.45) 18.25,27.85 18.25,29.8 19.08,30.63 19.08,31.13 18.32,31.89 18.32,32.36 18.5,32.54 U4.3 20.12,32.01 20.85,31.29 25.72,31.29 26.77,32.34 26.77,35.56 26.48,35.86 20.78,35.86 20.54,35.61 v1(19.98,35.61) 19.98,34.59 U4.1 ; v2(22.26,26.17) 23.48,26.17 26.1,23.55 26.1,23.46 26.43,23.13 26.52,23.13 26.74,22.92 26.74,20.87 26.02,20.15 U18.8 ; U17.1 33.5,50.83 v1(33.5,49.84) ; U17.3 31.71,49.95 v1(31.94,49.72) 31.38,49.72 31.24,49.57 29.32,49.57 29.14,49.76 29.14,51.23 28.31,52.05 25.74,52.05 25.48,52.3 U19.4 25.48,54.49 ; 25.48,54.49 25.5,54.51 25.5,56.55 25.25,56.8 24.29,56.8 22.83,55.34 U19.32 18.61,55.34 17.42,54.15 17.42,49.38 17.89,48.91 Q4.3 20.03,48.91 20.51,48.43 v1(20.51,39.86) ; R36.2 19.35,73.42 21.49,75.56 26.46,75.56 J9.2 ; C13.1 60.76,61.44 61.18,61.85 v2(61.18,65.46) ; v1(43.64,23.5) 43.19,23.04 40.33,23.04 40.27,22.98 34.85,22.98 34.07,23.76 C6.1
  TOP w0.305: v2(92.86,61.86) 92.86,62.62 R13.1 ; C3.2 38.06,18.23 v2(37.3,18.23) ; R34.2 40.71,72.14 v2(40.71,71.37) ; C6.1 34.58,25.35 v2(35.34,25.35) ; R5.1 21.5,26.17 v2(22.26,26.17) ; C36.1 92.81,58.15 v2(92.81,57.38) ; R1.1 86.13,24.19 v2(86.13,23.43) ; C12.1 61.18,66.22 v2(61.18,65.46) ; R24.1 91.54,24.23 v2(91.54,23.46) ; C35.2 94.15,54.44 v2(94.15,53.68) ; R4.2 76.65,19.81 v2(75.89,19.81) ; R33.2 40.72,67.65 v2(40.72,66.89) ; R6.2 30.22,26.68 v2(30.98,26.68) ; v2(56.67,38.03) 56.67,38.79 C5.2 ; R23.1 106.06,17.63 v2(106.06,16.87) ; C13.1 61.27,60.04 v2(61.27,59.28) ; v2(32.93,33.94) 33.69,33.94 C8.1 ; C4.2 76.14,54.57 v2(76.14,53.81) ; R21.1 107.33,14.64 v2(107.33,15.41) ; v2(54.38,13.32) 53.61,13.32 D4.1 ; v2(71.75,19.81) 72.51,19.81 R3.2 ; R36.2 12.98,72.91 v2(12.98,72.15) ; C11.2 62.51,72.46 v2(62.51,71.7) ; D10.1 11.06,68.97 v2(12.07,67.96)
  BOTTOM w0.152: v2(71.75,19.81) 75.35,19.81 75.36,19.81 v2(75.89,19.81)
  BOTTOM w0.254: v2(35.34,25.35) 34.45,26.24 33.43,26.24 32.99,26.68 v2(30.98,26.68) 22.77,26.68 v2(22.26,26.17) 21.49,26.95 20.81,26.95 20.31,27.45 v1(18.64,27.45) ; v1(19.98,35.61) 20.51,36.14 v1(20.51,39.86) ; v1(33.5,49.84) 33.38,49.72 v1(31.94,49.72) ; v2(40.71,71.37) 38.22,73.86 J9.2 27.09,73.86 26.05,72.82 25.09,72.82 24.36,72.09 24.36,70.06 23.74,69.44 23.74,60.42 v1(25.9,58.25) ; v1(79.34,21.23) 79.04,21.53 79.04,23.39 78.79,23.65 77.6,23.65 77.35,23.9 77.35,28.65 78,29.31 v1(78.99,29.31) ; v2(37.3,18.23) 41.51,18.23 43.64,20.36 v1(43.64,23.5) 44.72,24.58 44.72,24.61 45.28,25.17 45.28,26.46 45.28,26.46 45.28,26.93 45.28,26.93 v1(45.28,28.74) ; v1(65.45,59.74) 63.56,57.85 62.05,57.85 61.27,58.62 v2(61.27,59.28) ; v2(40.72,66.89) 43.28,66.89 44.19,65.98 60.66,65.98 v2(61.18,65.46) ; v1(86.16,17.16) 86.16,22.82 86.13,22.85 v2(86.13,23.43) 86.13,24.09 87.5,25.46 90.39,25.46 91.54,24.32 v2(91.54,23.46) ; v1(63.07,48.32) 71.59,48.32 v1(73.11,49.85) 73.11,50.78 v2(76.14,53.81) 91.92,53.81 92.81,52.92 93.38,52.92 v2(94.15,53.68) ; v2(12.07,67.96) 12.98,68.87 v2(12.98,72.15)
GND: length 810.5
  TOP w0.254: v1(89.88,45.4) 87.25,45.4 87.03,45.18 J1.6 82.64,48.55 82.64,48.79 79.56,51.87 v1(79.56,55.8) ; 136.51,31.62 138.04,30.09 138.04,27.77 RT2.2 ; 136.51,31.62 137.2,32.32 137.2,35.79 132.72,40.28 D13.1 ; 136.51,31.62 RT1.2 ; R27.2 35.99,27.26 v2(35.34,26.62) ; 16.78,40.91 16.34,40.48 14.95,40.48 14.93,40.46 U3.14 ; 16.78,40.91 16.78,39.9 ; 16.78,40.91 v1(16.78,41.84) ; v1(80.54,74.7) 80.41,74.56 80.41,74.2 80.61,74 U5.1 ; v2(50.25,13.34) 51.84,13.34 52.41,13.9 54.88,13.9 55.17,13.61 56.34,13.61 56.36,13.62 Y1.2 ; v2(33.52,44.96) 33.52,46.42 32.74,47.2 32.74,49.87 32.66,49.95 U17.2 32.66,52.7 33.31,53.34 34.39,53.34 36.44,51.29 36.44,49.59 36.69,49.34 40.37,49.34 40.6,49.57 v2(40.6,50.77) ; C13.2 65.53,60.55 65.71,60.73 66.35,60.73 ; v1(34.13,28.83) 34.13,28.2 34.07,28.14 C6.2 ; 16.78,39.9 16.8,39.88 v1(16.8,39.43) ; 16.78,39.9 16.78,36.67 16.8,36.65 ; v2(12.15,18.95) 11.08,17.88 U16.1 ; J9.6 v1(23.08,73.99) ; v1(55.45,38.03) v2(55.4,38.03) 56.72,36.71 58.77,36.71 60.65,38.59 U1.11 ; v1(81.8,37.28) 81.24,37.28 81.05,37.09 U1.62 ; U1.32 v1(66.82,31.6) ; U15.5 v1(52.39,23.03) ; U15.5 U15.4 ; U15.5 54.7,22.97 55.56,22.97 55.81,23.22 55.81,25.08 55.46,25.43 U15.2 51.14,25.43 50.57,24.87 ; v2(46.18,62.53) 45.37,62.53 44.36,61.53 44.36,55.3 42.05,52.98 42.05,52.85 41.23,52.04 R35.2 ; C24.2 51.1,32.08 v2(50.56,31.54) 51.14,30.96 51.14,28.78 51.55,28.37 51.77,28.37 52.1,28.04 52.1,27.58 51.77,27.25 51.55,27.25 51.14,26.84 51.14,26.27 50.76,25.88 50.45,25.88 50.43,25.86 49.56,25.86 ; v1(45.83,26.7) 40.41,26.7 40.35,26.75 v2(39.77,26.75) 40.64,25.88 47.91,25.88 47.93,25.86 C22.2 ; U3.8 11.5,34.11 13.13,35.73 13.13,36.39 13.38,36.65 U3.11 16.8,36.65 ; 65.7,65.99 66.46,66.75 U8.2 ; 65.7,65.99 65.7,61.37 66.35,60.73 ; 65.7,65.99 65.17,65.46 v2(62.45,65.46) ; 16.8,36.65 v1(17.79,37.63) ; C29.2 30.59,20.17 31.46,21.04 31.94,21.04 32.19,21.29 36.3,21.29 36.55,21.04 36.55,19.75 36.8,19.5 v2(37.3,19.5) ; 66.35,60.73 66.37,60.71 U10.2 ; v2(28.95,43.66) 28.95,44.24 28.99,44.28 28.99,44.32 29.01,44.34 29.19,44.34 29.53,44.68 29.53,45.17 29.2,45.5 29.2,46.76 28.7,47.26 28.7,47.73 28.49,47.94 28.49,51.13 28.15,51.47 25.04,51.47 24.68,51.83 U19.3 24.68,54.49 24.68,54.5 v1(24.68,55.98) ; C3.1 38.57,20.14 40.61,22.17 43.95,22.17 v1(45.13,23.36) ; v1(78.27,28.57) 76.16,30.68 74.71,30.68 73.97,31.42 73.97,39.38 73.66,39.7 73.66,40.75 71.98,42.43 71.98,43.4 73.32,44.74 U1.81 73.32,48.72 74.87,50.28 v2(74.87,53.81) ; v2(76.1,65.54) 76.64,65 C16.2 76.77,61.06 78.19,62.48 78.19,62.84 78.44,63.09 80.41,63.09 80.88,62.62 U9.1 ; RT4.2 132.98,8.03 v1(132.98,2.16) ; C2.1 60.74,55.56 61.18,55.99 61.79,55.99 62.54,56.74 v2(62.54,59.28) ; v1(30.42,43.67) 30.94,44.18 30.94,45.04 31.36,45.47 C28.2 ; C4.1 74.36,57.21 75.5,58.34 75.97,58.34 76.15,58.52 76.15,59.19 76.13,59.21 v2(76.13,59.79) ; v1(76.09,69.72) 79.26,69.72 79.91,69.07 ; 79.91,69.07 80.74,68.25 U7.1 ; 79.91,69.07 79.91,69.82 81.01,70.92 85.96,70.92 86.7,71.65 v1(86.7,73.52) ; v1(59.7,43.47) 60.39,44.15 63.52,44.15 64.32,44.96 U1.99 64.32,48.39 v1(63.45,49.26) ; v1(32.47,14.73) 30.03,12.29 30.03,9.13 29.93,9.03 29.93,8.84 29.43,8.33 C25.2 36.92,7.56 36.96,7.52 C27.2 ; C26.2 19.5,18.44 19.74,18.2 U18.4 v1(22.96,18.2) ; C8.2 39.3,32.16 v1(41.24,30.22) ; v2(98.34,26) 98.34,28.4 99.39,29.45 SW1.2 SW1.1 89.38,29.78 89.13,30.03 89.13,33.75 v1(89.88,34.51) ; v2(61.24,71.7) 61.24,70.79 61.49,70.53 64.39,70.53 64.64,70.79 64.64,71.04 66.5,72.89 v1(67.4,72.89) ; v1(25.78,33.3) 21.21,33.3 21.01,33.5 U4.2 18.01,33.5 16.08,31.56 v1(14.45,31.56) 13.87,31.56 13.62,31.31 U2.4 ; U14.7 v1(114.85,14.17)
  TOP w0.305: v2(46.18,62.53) 46.18,63.3 D7.1 ; v2(98.34,26) 98.34,25.24 D6.1 ; v2(28.95,43.66) 28.19,43.66 C33.1 ; C8.2 33.69,32.67 v2(32.93,32.67) ; C23.2 49.8,31.54 v2(50.56,31.54) ; v2(62.45,65.46) 62.45,66.22 C12.2 ; C35.1 92.88,54.44 v2(92.88,53.68) 92.88,52.04 J1.6 ; v2(94.08,57.38) 94.08,58.15 C36.2 ; C22.2 49.56,25.86 v2(50.58,24.85) ; C4.1 74.87,54.57 v2(74.87,53.81) ; v2(55.4,38.03) 55.4,38.79 C5.1 ; C28.2 32.76,44.96 v2(33.52,44.96) ; C29.2 30.21,19.66 v2(30.98,19.66) ; v2(57.46,31.57) 56.7,31.57 C24.2 ; v1(11.6,52.59) 11.6,51.83 C30.2 ; C16.2 76.13,60.55 v2(76.13,59.79) ; v2(124.68,41.55) 124.68,40.79 D13.1 ; C15.2 76.1,66.31 v2(76.1,65.54) ; C3.1 38.06,19.5 v2(37.3,19.5) ; C32.1 23.33,43.69 v2(24.09,43.69) ; v2(40.6,50.77) 40.6,51.53 R35.2 ; C26.2 12.91,18.95 v2(12.15,18.95) ; v2(61.25,53.4) 61.25,54.16 C2.1 ; v2(62.54,59.28) 62.54,60.04 C13.2 ; R27.2 39.01,26.75 v2(39.77,26.75) ; v2(61.24,71.7) 61.24,72.46 C11.1 ; v2(28.58,32.61) 29.34,32.61 C7.2 ; v2(35.34,26.62) 34.58,26.62 C6.2 ; C14.2 76.07,72.4 v2(76.07,71.63) ; v2(50.25,13.34) 49.49,13.34 C1.1
  TOP w0.635: v2(94.08,57.38) 95.21,57.38 96.37,56.22 v1(122.59,56.22)
  TOP w1.27: CN3.3 9.05,3.31 7.25,5.11 7.25,5.16 7.07,5.35 CN3.2 7.07,12.74 9.16,14.84 9.16,16.62 9.11,16.68 U16.1
  BOTTOM w0.152: 131.79,14.17 131.64,14.32 118.88,14.32 117.82,13.27 116.95,13.27 115.9,14.32 U14.7 ; RT4.2 137.33,12.38 137.49,12.38 137.64,12.53 137.64,16.76 137.49,16.92 RT3.2 136.65,19.03 136.95,19.03 137.1,19.18 137.1,24.12 136.95,24.27 RT2.2
  BOTTOM w0.254: v1(23.08,73.99) 21.87,72.78 21.87,58.79 v1(24.68,55.98) ; v1(89.88,45.4) 90.57,44.72 99.84,44.72 100.17,44.72 102.39,42.51 102.6,42.51 103.17,41.94 103.17,41.14 102.6,40.58 101.8,40.58 101.24,41.14 101.24,41.36 99.5,43.09 91.1,43.09 89.88,41.87 v1(89.88,34.51) ; v1(76.09,69.72) 76.09,69.01 76.07,68.99 ; v1(67.4,72.89) 68.71,72.89 70.55,71.05 75.48,71.05 v2(76.07,71.63) 76.07,68.99 ; v1(59.7,43.47) 59.12,43.47 58.2,44.38 57.84,44.38 56.2,42.75 56.18,42.75 56.03,42.9 55.57,42.9 55.24,42.57 55.24,42.11 55.57,41.78 55.64,41.78 55.95,41.47 55.95,38.58 v2(55.4,38.03) ; v2(24.09,43.69) 23.37,42.96 16.6,42.96 ; v2(94.08,57.38) 92.42,55.73 92.42,54.97 92.91,54.48 92.91,53.71 v2(92.88,53.68) ; CN1.11 15.82,29.11 14.45,30.49 v1(14.45,31.56) 16.04,31.56 16.18,31.71 16.2,31.71 16.21,31.69 ; v1(52.39,23.03) 52.39,15.47 v2(50.25,13.34) ; v1(41.24,30.22) 41.24,29.93 40.14,28.83 v1(34.13,28.83) ; v1(81.8,37.28) 85.45,33.64 85.45,33.28 80.74,28.57 v1(78.27,28.57) ; v1(17.79,37.63) 17.79,36.07 19.31,34.54 20.94,34.54 21.53,33.95 22.89,33.95 22.89,33.95 25.13,33.95 v1(25.78,33.3) 26.47,32.61 v2(28.58,32.61) 32.28,32.61 32.35,32.67 v2(32.93,32.67) ; v1(63.45,49.26) 70.32,49.26 v2(74.87,53.81) 74.87,54.6 74.33,55.14 74.33,55.5 74.63,55.8 v1(79.56,55.8) ; v1(16.8,39.43) 16.64,39.27 CN1.6 ; 16.6,42.96 16.78,42.79 v1(16.78,41.84) ; 16.6,42.96 CN1.12 13.87,42.96 13.72,43.11 11.86,43.11 11.49,43.48 11.48,43.48 10.95,44.01 10.95,45.08 11.6,45.73 v1(11.6,52.59) ; v1(55.45,38.03) 55.45,33.59 v2(57.46,31.57) 63.55,31.57 63.58,31.6 v1(66.82,31.6) ; v1(86.7,73.52) 86.7,74.26 86.26,74.7 v1(80.54,74.7) ; 131.79,14.17 RT3.2 ; v1(45.83,26.7) 45.83,25.15 45.13,24.44 v1(45.13,23.36) ; v1(76.6,66.83) 76.07,67.37 76.07,68.99 ; v2(28.95,43.66) 29.53,43.66 29.55,43.67 v1(30.42,43.67) ; v1(22.96,18.2) 27.68,18.2 28.56,19.08 30.39,19.08 v2(30.98,19.66) 31.69,18.94 31.69,15.51 v1(32.47,14.73)
  BOTTOM w0.635: v2(94.08,57.38) 95.19,57.38 96.46,56.12 BT1.2 ; v1(122.59,56.22) 123.87,54.94 123.87,54.94 124.77,54.04 124.77,42.42 124.68,42.32 v2(124.68,41.55)
VDD: length 90.6
  TOP w0.254: 8.2,43 7.66,42.46 7.66,42.41 v1(4.25,39) ; 8.2,43 6.47,43 v1(6.15,42.68) ; 8.2,43 U3.1 ; v1(35.26,40.54) 34.34,41.46 34.34,43.59 35.36,44.62 v1(35.36,47.23) ; v1(43.71,57.74) 43.71,55.51 41.73,53.52 38.23,53.52 36.89,52.17 36.89,50.31 v1(37.03,50.17) ; U4.5 23.15,34.45 23.46,34.76 v1(24.56,34.76) ; C7.1 29.85,34.51 30.67,35.33 30.79,35.33 31.69,36.22 v1(31.69,37.01)
  TOP w0.305: v2(28.58,33.88) 29.34,33.88 C7.1 ; R7.1 39.37,59.33 v2(39.37,58.57)
  BOTTOM w0.254: v1(31.69,37.01) 31.74,37.01 v1(35.26,40.54) ; v2(39.37,58.57) 39.37,57.99 39.62,57.74 v1(43.71,57.74) ; v1(37.03,50.17) 37.03,48.9 v1(35.36,47.23) ; v1(6.15,42.68) 6.55,43.07 11.32,43.07 11.69,42.7 12.7,42.7 13.71,41.69 14.97,41.69 16.13,40.54 18.38,40.54 18.43,40.59 20.82,40.59 21.39,40.02 21.39,36.87 22.14,36.12 22.14,35.03 22.66,34.51 23.22,34.51 23.47,34.76 v1(24.56,34.76) 24.9,34.76 25.78,33.88 v2(28.58,33.88) ; CN1.4 10.21,37.07 9.83,37.45 9.83,39.57 9.58,39.83 5.07,39.83 v1(4.25,39)
VIN: length 41.5
  TOP w0.254: v1(10.74,23.3) 10.05,22.6 9.31,22.6 ; v2(35.13,18.28) 35.13,17.29 34.6,16.76 33.6,16.76 29.43,12.58 C25.1 28.85,10.35 28.52,10.67 D5.1 20.3,12.27 v1(16.5,16.06)
  TOP w0.305: v2(35.13,18.28) 34.37,18.28 R26.1 ; C26.1 12.91,20.22 v2(12.15,20.22)
  BOTTOM w0.254: v1(16.5,16.06) 16.11,16.45 15.91,16.45 v2(12.15,20.22) 10.74,21.62 v1(10.74,23.3)
A0: length 91.2
  TOP w0.254: v1(93.55,51.36) 97.61,51.36 99.15,49.82 99.15,42.55 103.85,37.86 118.05,37.86 119.47,36.44 R8.2 ; U1.97 65.32,41.79 67.06,40.05 v1(71.34,40.05)
  TOP w0.305: R8.2 119,35.93 v2(119,35.17)
  BOTTOM w0.152: RT1.1 133.69,34.98 133.59,34.98 133.41,35.17 v2(119,35.17)
  BOTTOM w0.254: v1(93.55,51.36) 82.65,51.36 72.03,40.75 v1(71.34,40.05)
A1: length 93.8
  TOP w0.254: R9.2 119.51,33.55 118.91,34.15 115.48,34.15 112.43,37.2 103.43,37.2 98.39,42.24 98.39,49.5 97.29,50.6 v1(94.13,50.6) ; v1(72.29,39.93) 71.89,40.32 71.85,40.32 71.57,40.61 67.09,40.61 65.82,41.88 U1.96
  TOP w0.305: v2(119,31.39) 119,32.16 R9.2
  BOTTOM w0.152: v2(119,31.39) 125.74,31.39 130.32,26.81 RT2.1
  BOTTOM w0.254: v1(72.29,39.93) 72.7,40.34 82.96,50.6 v1(94.13,50.6)
A2: length 98.5
  TOP w0.254: v1(72.42,38.96) 72.84,39.38 72.84,40.41 72.17,41.09 67.28,41.09 66.32,42.06 U1.95 ; v1(93.55,49.82) 96.97,49.82 97.61,49.18 97.61,41.92 103.03,36.5 112.02,36.5 114.91,33.61 114.91,31.13 115.51,30.53 116.94,30.53 117.19,30.28 R10.1
  TOP w0.305: R10.1 117.7,28.49 v2(117.7,27.73)
  BOTTOM w0.254: v1(93.55,49.82) 83.29,49.82 v1(72.42,38.96) ; v2(117.7,27.73) 118.51,26.92 122.19,26.92 129.65,19.46 RT3.1
A3: length 106.8
  TOP w0.254: v1(94.13,49.16) 96.7,49.16 96.95,48.91 96.95,41.64 102.84,35.75 111.7,35.75 114.09,33.36 v1(114.09,28.07) ; v1(120.82,16.28) 124.81,12.29 v1(125.25,12.29) ; v1(73.3,38.91) 73.3,39.47 73.25,39.53 73.25,40.58 72.34,41.5 67.75,41.5 66.82,42.43 66.82,43.05 66.78,43.09 66.78,43.55 66.82,43.59 U1.94
  TOP w0.305: R11.2 118.98,24.78 v2(118.98,24.02)
  BOTTOM w0.254: RT4.1 133.52,12.13 133.36,12.29 v1(125.25,12.29) ; v1(94.13,49.16) 83.56,49.16 v1(73.3,38.91) ; v1(114.09,28.07) 115.65,26.51 118.55,26.51 119.49,25.58 119.49,25.22 118.98,24.71 v2(118.98,24.02) 118.98,18.12 v1(120.82,16.28)
A4: length 35.5
  TOP w0.254: U1.93 67.32,44.96 67.34,44.94 67.34,44.05 67.3,44.01 67.3,43.55 67.34,43.52 v1(67.34,43.32) ; J14.5 50.18,58.71 50.18,56.57 50.25,56.5 55.85,50.9 55.85,46.16 v1(56.61,45.4)
  BOTTOM w0.254: v1(56.61,45.4) 58.11,45.4 58.9,46.18 59.7,46.18 60.97,44.91 64.5,44.91 66.1,43.32 v1(67.34,43.32)
A5: length 39.6
  TOP w0.254: J14.4 54.8,64.79 55.24,64.35 55.24,61.4 54.98,61.14 53.44,61.14 50.74,58.45 50.74,56.58 55.6,51.73 55.71,51.73 56.29,51.15 56.29,46.59 56.64,46.24 v1(58.03,46.24) ; v1(67.96,44.17) 67.82,44.31 U1.92
  BOTTOM w0.254: v1(58.03,46.24) 58.42,46.64 59.82,46.64 60.61,45.85 64.15,45.85 66.22,43.78 67.01,43.78 67.1,43.88 67.57,43.88 67.66,43.78 67.86,43.78 67.96,43.88 v1(67.96,44.17)
A6: length 41.6
  TOP w0.254: v1(65.48,51.06) 65.99,51.57 68.19,51.57 68.32,51.44 U1.91 ; J14.3 55.56,67.33 55.81,67.07 55.81,61.39 55.16,60.74 53.65,60.74 51.23,58.32 51.23,56.67 55.77,52.13 56,52.13 56.74,51.39 56.74,51.11 57,50.86 v1(57.48,50.86)
  BOTTOM w0.254: v1(65.48,51.06) 64.68,51.06 64.26,51.48 58.66,51.48 58.04,50.86 v1(57.48,50.86)
A7: length 44.4
  TOP w0.254: U1.90 68.82,51.98 68.57,52.22 66.07,52.22 66.06,52.24 65.39,52.24 65.1,51.95 v1(64.96,51.95) ; J14.2 56.07,69.87 56.32,69.62 56.32,61.23 55.31,60.21 53.78,60.21 51.68,58.11 51.68,56.8 55.94,52.54 56.18,52.54 57.07,51.65 v1(57.63,51.65)
  BOTTOM w0.254: v1(64.96,51.95) 58.01,51.95 57.71,51.65 v1(57.63,51.65)
A9: length 47.6
  TOP w0.254: U1.88 69.82,52.57 69.56,52.82 v1(65,52.82) ; 57.16,52.48 57.17,52.48 ; 57.16,52.48 56.7,52.95 56.11,52.95 52.32,56.73 52.08,56.97 52.08,57.94 53.88,59.73 55.41,59.73 56.74,61.07 56.74,71.48 55.82,72.41 J14.1 ; 57.16,52.48 v1(57.63,52.48)
  BOTTOM w0.254: v1(57.63,52.48) 64.12,52.48 64.46,52.82 v1(65,52.82)
A10: length 112.1
  TOP w0.254: U1.87 70.32,44.96 70.23,44.87 v1(70.23,43.41)
  BOTTOM w0.254: J12.2 92.48,11.28 86.72,17.04 86.72,16.93 86.39,16.61 85.93,16.61 85.6,16.93 85.6,17.19 82.73,17.19 79.79,20.13 79.79,20.89 79.9,21 79.9,21.47 79.79,21.57 79.79,26.97 89.03,36.21 89.03,42.28 90.25,43.5 99.67,43.5 101.64,41.53 101.64,41.31 101.97,40.98 102.43,40.98 102.76,41.31 102.76,41.77 102.43,42.1 102.22,42.1 100.01,44.31 90.18,44.31 89.03,45.46 89.03,46.48 88.78,46.74 82.82,46.74 75.08,38.99 75.08,38.27 74.09,37.29 72.19,37.29 71.85,37.63 69.99,39.49 69.99,39.99 69.99,40.61 70.23,40.85 v1(70.23,43.41)
A11: length 73.8
  TOP w0.254: v1(72.64,33.15) 72.64,37.68 71.11,39.2 v1(68.8,39.2) ; U1.86 70.82,44.96 70.89,44.88 70.89,42.57 70.71,42.39 v1(68.8,42.39) ; v1(94.96,5.07) 94.96,8.23 93.59,9.59 U20.6 76.24,9.59 v1(75.94,9.9)
  BOTTOM w0.254: v1(68.8,39.2) v1(68.8,42.39) ; J12.3 v1(94.96,5.07) ; v1(72.64,33.15) 76.57,29.21 76.57,26.47 76.39,26.29 73.34,26.29 70.24,23.19 70.24,17.34 70.66,16.92 73.72,16.92 73.88,16.76 73.88,16.45 75.94,14.4 v1(75.94,9.9)
CMP: length 26.7
  TOP w0.254: v1(42.74,24.28) 40.97,24.28 v2(39.77,25.48) ; R26.2 33.86,19.93 33.04,19.12 32.92,19.12 32.19,18.39 v2(30.98,18.39) ; C29.1 28.82,17.88 28.5,18.2 U18.5
  TOP w0.305: v2(39.77,25.48) 39.01,25.48 R27.1 ; v2(35.13,19.55) 34.37,19.55 R26.2 ; C29.1 30.21,18.39 v2(30.98,18.39)
  BOTTOM w0.254: v1(42.74,24.28) 40.19,21.73 35.85,21.73 35.13,21.01 v2(35.13,19.55)
COMP_5V: length 22.5
  TOP w0.254: v1(75.11,10.81) 76.43,12.13 U20.8 ; J12.1 89.94,7.07 88.71,8.3 78.31,8.3 78.28,8.32 U20.5 76.5,8.32 76.29,8.11 75.94,8.11 v1(75.62,8.43)
  BOTTOM w0.254: v1(75.62,8.43) 75.11,8.93 v1(75.11,10.81)
COMP_GND: length 48.8
  TOP w0.254: U20.4 73.4,8.32 75.33,10.26 75.35,10.26 75.67,10.58 75.67,10.6 75.94,10.86 U20.7 98.07,10.86 99.97,8.96 99.97,6.28 100.1,6.15 J12.5 ; v2(97.16,17.84) v1(97.16,17.84)
  TOP w0.305: v2(97.16,17.84) 97.16,18.6 D14.1
  BOTTOM w0.254: v1(97.16,17.84) 97.16,13.67 99.97,10.85 99.97,6.28 100.1,6.15 J12.5
CS: length 9
  TOP w0.254: v1(6.39,36.28) 6.76,36.65 U3.6
  BOTTOM w0.254: CN1.2 7.02,34.87 6.39,35.5 v1(6.39,36.28)
D2: length 51.6
  TOP w0.254: v1(82.88,52.82) 89.73,59.67 89.73,63.51 90.76,64.54 94.11,64.54 94.64,64.01 ; v1(63.65,41.53) 63.21,41.09 U1.6 ; 94.64,64.01 94.64,65.14 93.98,65.8 Q1.2 ; 94.64,64.01 R13.2 ; v1(75.46,49.23) v1(77.57,51.34)
  TOP w0.305: R13.2 94.13,62.62 v2(94.13,61.86)
  BOTTOM w0.254: v1(77.57,51.34) 79.05,52.82 v1(82.88,52.82) ; v1(75.46,49.23) 70.62,44.39 69.84,44.39 68.83,43.38 68.4,43.38 67.79,42.76 67.79,41.69 67.42,41.33 64.91,41.33 64.71,41.53 v1(63.65,41.53)
D3: length 102.9
  TOP w0.254: J13.3 103.84,69.83 104.5,69.17 v1(104.5,67.58) ; v1(91.89,52.38) 91.64,52.13 v1(83.83,52.13) ; v1(76.85,49.58) 77.81,50.54 v1(78.15,50.54) ; v1(64.2,40.85) 63.94,40.59 U1.7 ; v1(105.84,59.48) 122.72,59.48 123.23,58.97 v1(123.23,53.4)
  BOTTOM w0.254: v1(83.83,52.13) 79.74,52.13 v1(78.15,50.54) ; v1(123.23,53.4) 123.08,53.25 122.74,53.25 121.87,52.38 v1(91.89,52.38) ; v1(76.85,49.58) 72.56,45.29 72.1,45.29 70.78,43.97 70,43.97 68.98,42.95 68.56,42.95 68.24,42.62 68.24,41.42 67.67,40.85 v1(64.2,40.85) ; v1(105.84,59.48) 105.84,66.24 v1(104.5,67.58)
D4: length 102.5
  TOP w0.254: v1(64.35,42.88) 64,43.23 63.12,43.23 62.76,43.59 U1.1 ; v1(59.36,45.15) 59.36,46.67 58.88,47.15 57.96,47.15 57.61,46.79 56.95,46.79 56.71,47.03 56.71,50.03 56.97,50.28 57.96,50.28 58.74,51.07 58.74,52.65 58.04,53.35 56.27,53.35 52.49,57.14 52.49,57.77 53.98,59.26 55.51,59.26 57.22,60.97 v1(57.22,72.54)
  BOTTOM w0.254: v1(59.36,45.15) 61.64,42.88 v1(64.35,42.88) ; v1(57.22,72.54) 57.22,74.19 58.69,75.65 84.27,75.65 84.7,75.23 106.12,75.23 106.38,74.97 J13.2
D5: length 87.8
  TOP w0.254: U1.5 60.74,41.59 60.53,41.37 58.2,41.37 v1(57.95,41.62) ; v1(55.8,42.34) 52.79,45.35 v1(52.79,45.39) ; J13.1 109.05,71.05 109.05,72.13 108.8,72.38 97.64,72.38 97.28,72.03 v1(97.28,67.14)
  BOTTOM w0.254: v1(97.28,67.14) 95.54,65.4 85.5,65.4 84.87,64.76 83.19,64.76 83.08,64.88 80,64.88 78.45,63.33 73.75,63.33 73.15,62.73 73.15,57.4 72.43,56.68 72.43,53.11 69.49,50.17 63.33,50.17 61.52,48.36 55.77,48.36 v1(52.79,45.39) ; v1(57.95,41.62) 57.23,42.34 v1(55.8,42.34)
D8: length 66.1
  TOP w0.254: R39.2 119.53,41.34 119.32,41.55 102.47,41.55 102.46,41.54 v1(102.2,41.54) ; v1(65.58,37.24) 64.43,36.09 U1.16
  TOP w0.305: R39.2 119.02,39.73 v2(119.02,38.97)
  BOTTOM w0.254: v1(102.2,41.54) 99.84,43.91 80.78,43.91 75.48,38.6 75.48,38.1 74.26,36.88 72.03,36.88 71.44,37.47 70.61,38.3 69.69,38.3 68.63,37.24 v1(65.58,37.24)
D22: length 59.8
  TOP w0.254: U1.78 74.82,44.96 75.01,44.77 75.01,32.25 75.34,31.92 75.77,31.92 76.2,31.49 77,31.49 78.7,29.8 78.76,29.86 79.23,29.86 79.55,29.54 79.55,29.07 79.23,28.75 79.18,28.75 79.18,28.5 80.12,27.57 80.12,27.16 79.06,26.1 78.84,26.1 78.52,25.77 78.52,25.31 78.84,24.98 79.31,24.98 79.42,25.1 81.11,23.41 81.11,22.57 81.59,22.09 83.14,22.09 84.05,21.18 84.84,21.18 86.92,19.11 R40.1
  TOP w0.305: v2(91.64,17.84) 91.64,18.6 R40.1
  BOTTOM w0.254: v2(91.64,17.84) 91.64,17.25 91.67,17.22 91.67,13.49 91.92,13.23 96.43,13.23 97.56,12.1 J12.4
D23: length 44.2
  TOP w0.254: v1(70.55,24.63) 70.87,24.31 70.87,12.74 71.48,12.13 U20.1 ; U1.77 75.32,45.26 75.4,45.17 75.4,45.09 75.41,45.09 75.41,33.48 75.64,33.25 v1(75.64,32.7)
  BOTTOM w0.254: v1(70.55,24.63) 71.16,25.25 71.65,25.25 72.22,25.81 72.22,26.62 71.33,27.51 71.11,27.51 70.78,27.84 70.78,28.3 71.11,28.63 71.57,28.63 71.58,28.63 74.08,31.13 72.62,32.59 72.41,32.59 72.08,32.92 72.08,33.38 72.41,33.71 72.87,33.71 73.2,33.38 73.2,33.16 73.66,32.7 v1(75.64,32.7)
D25: length 50.7
  TOP w0.254: J13.5 99.52,70.15 99.52,69.76 v1(103.07,66.21) ; U1.75 78.45,43.59 79.09,44.23 79.09,47.09 80.04,48.04 80.04,50.13 79.14,51.03 79.14,51.15 78.75,51.54 78.75,55.25 78.59,55.4 78.59,56.2 79.16,56.76 79.96,56.76 80.83,55.89 81.53,55.89 82.07,56.43 v1(82.63,56.43)
  BOTTOM w0.254: v1(82.63,56.43) 83.27,57.07 85.73,57.07 88.88,60.22 90.15,60.22 95.16,60.22 95.36,60.42 96.19,60.42 96.39,60.22 97.38,60.22 103.07,65.91 v1(103.07,66.21)
D26: length 51.1
  TOP w0.254: v1(83.33,55.78) 82.45,55.78 82.08,55.41 80.73,55.41 79.79,56.36 79.33,56.36 79,56.03 79,55.57 79.15,55.41 79.15,51.7 80.56,50.3 80.56,47.82 79.64,46.9 79.64,44.13 78.59,43.09 U1.74 ; J13.4 103.66,68.55 v1(103.66,66.79)
  BOTTOM w0.254: v1(83.33,55.78) 84.15,56.6 85.84,56.6 88.98,59.74 89.3,59.74 90.78,59.74 95.26,59.74 95.53,60.01 96.02,60.01 96.29,59.74 97.75,59.74 103.66,65.65 v1(103.66,66.79)
D50: length 99.6
  TOP w0.254: v1(63.73,33.09) U1.22 59,33.09 58.38,33.7 46.76,33.7 v1(42.06,38.4) ; v1(13.17,44.63) 9.51,44.63 8.64,43.76 5.8,43.76 4.51,42.48 v1(4.51,40.39)
  BOTTOM w0.254: v1(63.73,33.09) 65.35,33.09 66.77,34.51 72.06,34.51 72.07,34.52 73.21,34.52 73.22,34.51 75.54,34.51 75.8,34.77 78.14,34.77 J1.1 ; v1(4.51,40.39) 10.84,40.39 10.86,40.37 CN1.7 ; v1(13.17,44.63) 13.17,45.39 13.99,46.21 35.71,46.21 36.04,45.87 36.04,44.41 v1(42.06,38.4)
D51: length 142.8
  TOP w0.254: 62.45,33.59 62.63,33.59 ; 62.45,33.59 62.46,33.6 63.45,33.6 ; 62.45,33.59 U1.21 ; 62.63,33.59 v1(62.9,33.85) ; 62.63,33.59 63.44,33.59 63.45,33.6 ; U20.3 70.66,9.59 68.78,11.47 68.78,22.29 v1(68.5,22.58) ; 63.45,33.6 63.53,33.68 64.97,33.68 65.23,33.42 65.23,32.61 60.21,27.58 60.21,23.24 60.31,23.14 v1(60.31,22.58) ; U3.5 6.27,37.92 5.59,37.24 5.59,32.7 6.12,32.18 v1(9.13,32.18) ; v1(57.93,35.17) 57.83,35.27 v1(47.59,35.27) ; v1(81.06,38.51) 84.15,38.51 84.58,38.94 84.58,41.21 J1.4
  BOTTOM w0.254: v1(68.5,22.58) v1(60.31,22.58) ; v1(47.59,35.27) 41.66,29.34 41.25,29.34 39.84,27.93 22.6,27.93 22.51,28.03 22.02,28.03 21.93,27.93 18.95,27.93 18.88,28.01 18.41,28.01 18.34,27.93 10.69,27.93 9.13,29.5 v1(9.13,32.18) ; v1(57.93,35.17) 61.58,35.17 v1(62.9,33.85) 64.23,33.85 65.88,35.5 78.05,35.5 v1(81.06,38.51)
D52: length 151.3
  TOP w0.254: v1(60.77,23.48) 60.77,27.57 65.71,32.51 65.71,33.82 65.46,34.07 65.28,34.07 65.27,34.09 63.52,34.09 ; v1(64.66,35.22) 63.52,34.09 ; 63.52,34.09 63.45,34.09 63.13,34.41 62.67,34.41 62.34,34.09 U1.20 ; U3.3 6.4,40.46 5.16,39.22 5.16,31.26 5.98,30.44 10.81,30.44 11.07,30.69 11.07,32.02 13.15,34.11 U3.9 15.02,34.11 v1(15.49,34.58) ; v1(56.99,35.93) 49.77,35.93 49.37,36.33 v1(49.37,42.4) ; v1(69.4,23.48) 70.05,22.82 70.05,12 71.19,10.86 U20.2
  BOTTOM w0.254: v1(56.99,35.93) 63.94,35.93 v1(64.66,35.22) 65.51,36.08 77.95,36.08 80.3,38.43 80.3,39.47 J1.3 ; v1(15.49,34.58) 17.94,34.58 19.05,33.47 24.02,33.47 26.32,31.17 38.14,31.17 v1(49.37,42.4) ; v1(69.4,23.48) v1(60.77,23.48)
D53: length 65.3
  TOP w0.254: v1(10.15,32.93) 9.63,32.93 9.61,32.95 6.25,32.95 6,33.2 6,34.99 6.39,35.38 U3.7 ; U1.19 47.2,34.59 v1(43.66,38.13) ; v1(22.76,37.09) 20.38,37.09 18.03,34.74 16.48,34.74 v1(14.77,33.03)
  BOTTOM w0.254: v1(22.76,37.09) 23.66,36.19 41.71,36.19 v1(43.66,38.13) ; v1(10.15,32.93) 14.11,32.93 14.21,33.03 v1(14.77,33.03)
D+: length 20
  TOP w0.254: v2(11.67,59.26) 9.44,57.03 6.63,57.03 5.71,56.11 RV1.2 ; CN4.3 9.59,63.58 v1(9.91,63.91)
  TOP w0.305: RV1.2 5.58,54.65 v2(5.58,53.76) ; v2(11.67,59.26) 11.67,60.03 R28.1
  BOTTOM w0.254: v2(11.67,59.26) 9.91,61.02 v1(9.91,63.91)
D-: length 34.4
  TOP w0.254: v2(5.42,71.06) 8.38,71.06 8.86,70.58 8.86,66 9.11,65.74 9.19,65.74 9.51,65.41 9.51,64.95 9.19,64.62 8.85,64.62 8.6,64.38 CN4.2 ; v1(7.87,56.45) 10.48,56.45 11.09,55.84 R29.1
  TOP w0.305: R29.1 11.6,55.31 v2(11.6,54.55) ; RV2.2 5.42,71.95 v2(5.42,71.06)
  BOTTOM w0.254: v2(5.42,71.06) 6.41,70.08 6.41,60.45 7.87,58.98 v1(7.87,56.45)
DATA: length 49
  TOP w0.254: v1(82.68,63.91) 82.2,63.91 81.42,64.69 81.42,65.85 ; v1(79.26,71.22) 80.04,72 U5.5 ; 81.42,65.85 U7.5 ; 81.42,65.85 82.63,64.64 88.81,64.64 90.94,66.76 Q1.3 94.48,66.76 94.97,67.26 94.97,68.49 v2(94.1,69.36) ; v1(81.55,59.35) 80.45,59.35 80.17,59.62 80.17,60.31 80.48,60.62 U9.5
  TOP w0.305: v2(94.1,69.36) 94.1,70.12 R12.2
  BOTTOM w0.254: v1(79.26,71.22) 89.15,71.22 89.83,70.54 92.92,70.54 v2(94.1,69.36) ; v1(81.55,59.35) 82.68,60.47 v1(82.68,63.91)
DATA_IN: length 10.8
  TOP w0.254: v1(6.09,38.93) 6.34,39.19 U3.4
  BOTTOM w0.254: 6.34,39.2 6.09,38.95 v1(6.09,38.93) 7.4,37.62 7.4,37.15 8.58,35.97 CN1.3
DTR: length 34.6
  TOP w0.254: v1(37.06,61.32) v1(37.06,54.87) ; v1(34.68,61.32) 31.91,58.54 U19.13
  TOP w0.305: C34.2 47.82,50.35 v2(47.82,49.59) ; v2(39.33,50.77) 39.33,51.53 R35.1
  BOTTOM w0.254: v1(34.68,61.32) v1(37.06,61.32) ; v1(37.06,54.87) 37.06,53.03 v2(39.33,50.77) 41.52,52.97 47.05,52.97 47.82,52.19 v2(47.82,49.59)
GATE_CMD: length 36.9
  TOP w0.254: U18.7 26.06,19.5 27.15,20.59 27.15,22.82 27.23,22.9 27.23,24.95 27.13,25.05 27.13,25.39 27.23,25.5 27.23,37.98 26.72,38.49 20.32,38.49 19.71,39.1 Q4.1
M8RXD: length 18.9
  TOP w0.254: U19.9 31.24,55.34 31.25,55.33 v1(33.52,55.33)
  TOP w0.305: v2(46.14,54.55) 46.14,55.31 R32.1
  BOTTOM w0.254: v1(33.52,55.33) 35.19,56.99 42.86,56.99 45.31,54.55 v2(46.14,54.55)
M8TXD: length 14.8
  TOP w0.254: U19.8 28.68,52.54 29.59,51.63 29.95,51.63 30.6,52.29 31.52,52.29 33.3,54.06 38.85,54.06 v2(39.33,54.54)
  TOP w0.305: R31.1 39.33,55.3 v2(39.33,54.54)
MISO2: length 9.8
  TOP w0.254: J9.1 29.78,69.7 29.78,64.12 28.68,63.02 U19.17
MOSI2: length 21.3
  TOP w0.254: U19.16 31.95,60.94 33.38,62.37 33.38,66.62 33.36,66.64 33.36,71.31 32.1,72.57 26.9,72.57 J9.4
RD+: length 10.6
  TOP w0.254: U19.29 14.47,57.74 v2(12.94,59.26) v1(12.92,59.26)
  TOP w0.305: v2(12.94,59.26) 12.94,60.03 R28.2
  BOTTOM w0.254: v2(12.94,59.26) v1(12.92,59.26)
RD-: length 10
  TOP w0.254: U19.30 14.5,56.94 14.31,56.76 14.31,56.63 13.5,55.82 R29.2
  TOP w0.305: R29.2 12.87,55.31 v2(12.87,54.55)
RESET: length 170.8
  TOP w0.254: v1(79.08,25.54) 81.69,28.16 81.69,28.73 82.07,29.1 82.07,31.77 82.35,32.05 82.35,32.06 82.67,32.39 83.14,32.39 83.52,32 83.52,31.46 82.88,30.82 82.88,28.74 82.51,28.37 82.51,27.82 82.26,27.58 82.26,25.86 81.24,24.83 81.24,24.43 81.93,23.74 81.93,23.16 82.18,22.9 83.48,22.9 84.39,22 87.1,22 87.4,22.29 v2(87.4,23.43) ; SW1.3 SW1.4 94.81,34.98 94.8,34.99 90.19,34.99 90.12,35.06 89.65,35.06 89.33,34.74 89.33,34.66 88.63,33.96 ; J1.5 82.45,45.18 81.5,44.23 81.5,43.55 79.91,41.96 79.91,37.95 80.17,37.7 81.43,37.7 81.57,37.84 82.04,37.84 82.18,37.7 v1(84.42,37.7) ; v2(50.25,14.61) 50.74,15.09 D4.2 ; U1.30 65.82,23.33 ; 65.82,23.33 65.84,23.35 v1(65.84,24.2) ; 65.82,23.33 v1(65.82,16.08) ; v1(78.39,26.6) 75.84,26.6 v1(74.97,27.47) ; R1.2 87.95,24.7 88.63,25.38 88.63,33.96 ; 88.63,33.96 87.6,34.98 v1(87.6,36.96) ; v2(47.96,46.54) 47.96,42.23 46.61,40.88 39.8,40.88 38.65,39.73 38.65,37.33 44.59,31.39 44.82,31.39 44.88,31.32 v1(45.99,31.32) ; v1(68.47,24.2) 70.69,26.42 70.69,26.44 71.34,27.09 v1(71.34,28.07) ; v1(46.67,21.53) 46.67,20.81 48.98,18.5 C1.2
  TOP w0.305: v2(87.4,23.43) 87.4,24.19 R1.2 ; C34.1 46.55,50.35 v2(46.55,49.59) ; C1.2 49.49,14.61 v2(50.25,14.61) ; v2(54.38,14.59) 53.61,14.59 D4.2
  BOTTOM w0.254: v1(65.82,16.08) 55.87,16.08 v2(54.38,14.59) ; v1(45.99,31.32) 46.67,30.65 v1(46.67,21.53) ; v1(68.47,24.2) v1(65.84,24.2) ; v1(87.6,36.96) 86.86,37.7 v1(84.42,37.7) ; v1(74.97,27.47) 71.95,27.47 v1(71.34,28.07) ; v2(46.55,49.59) 46.55,48.2 46.56,48.19 J8.2 J8.1 ; v1(79.08,25.54) 79.08,26.28 78.76,26.6 v1(78.39,26.6)
  BOTTOM w0.305: J8.1 47.96,47.43 v2(47.96,46.54) ; v2(46.69,46.54) 46.69,47.43 J8.2
